# EAGLE board pp_module_rev_c_3_up (EAGLE 6.4), part 1 of 3
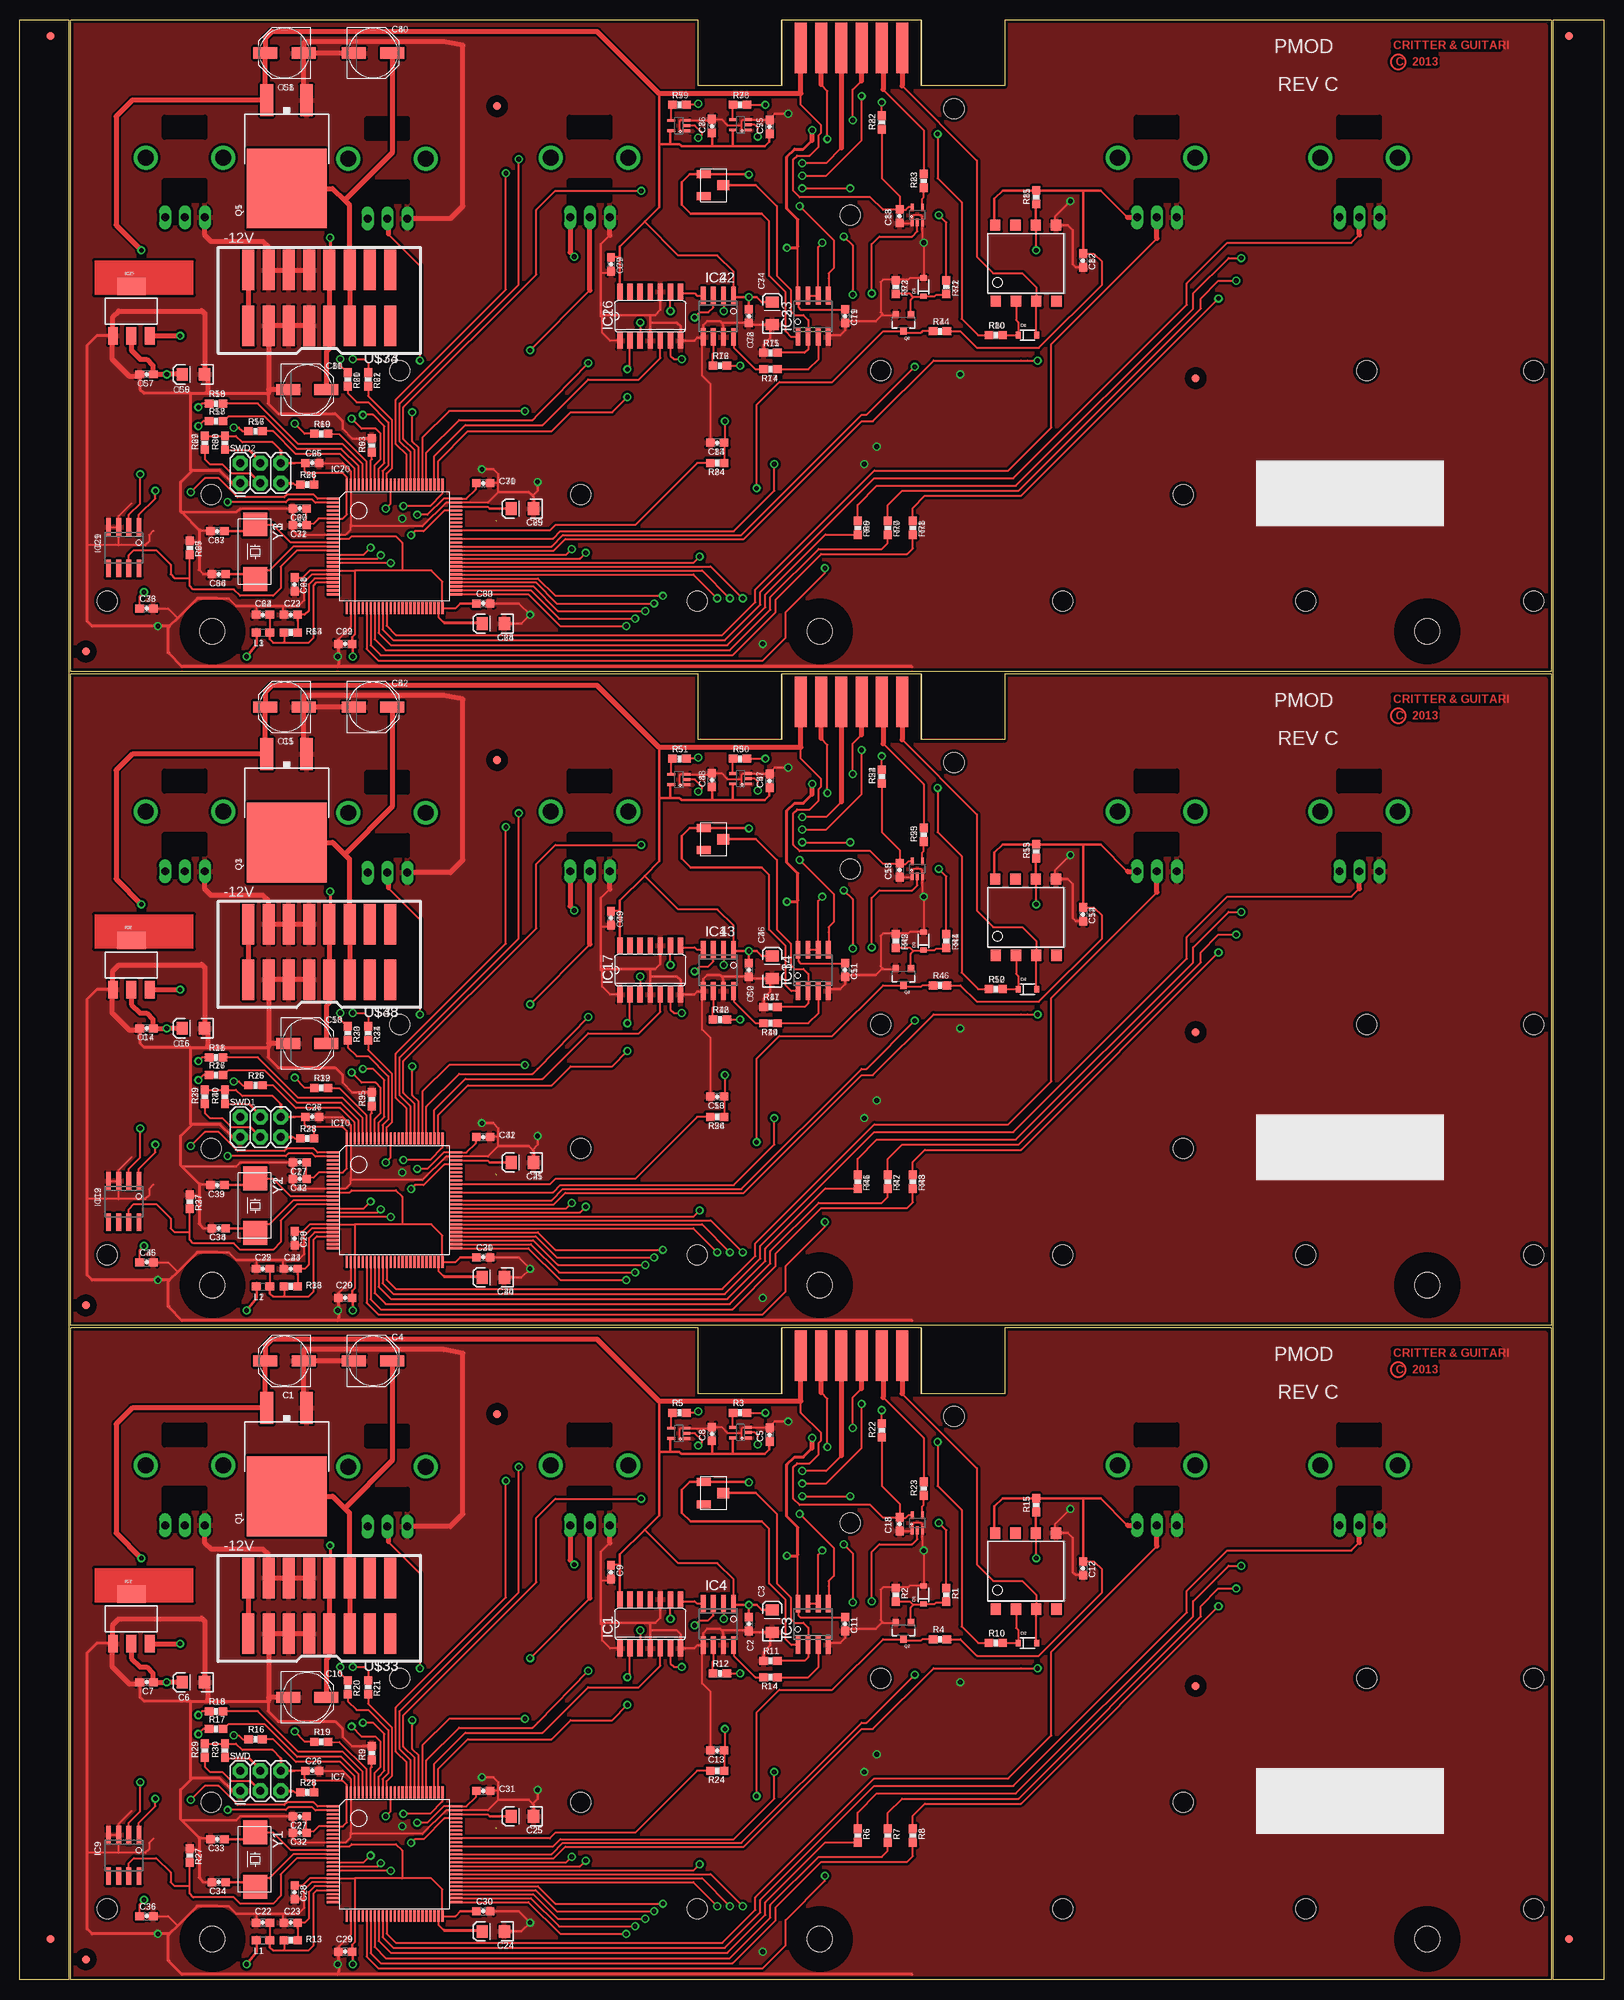
[diagram p0: board, top side]
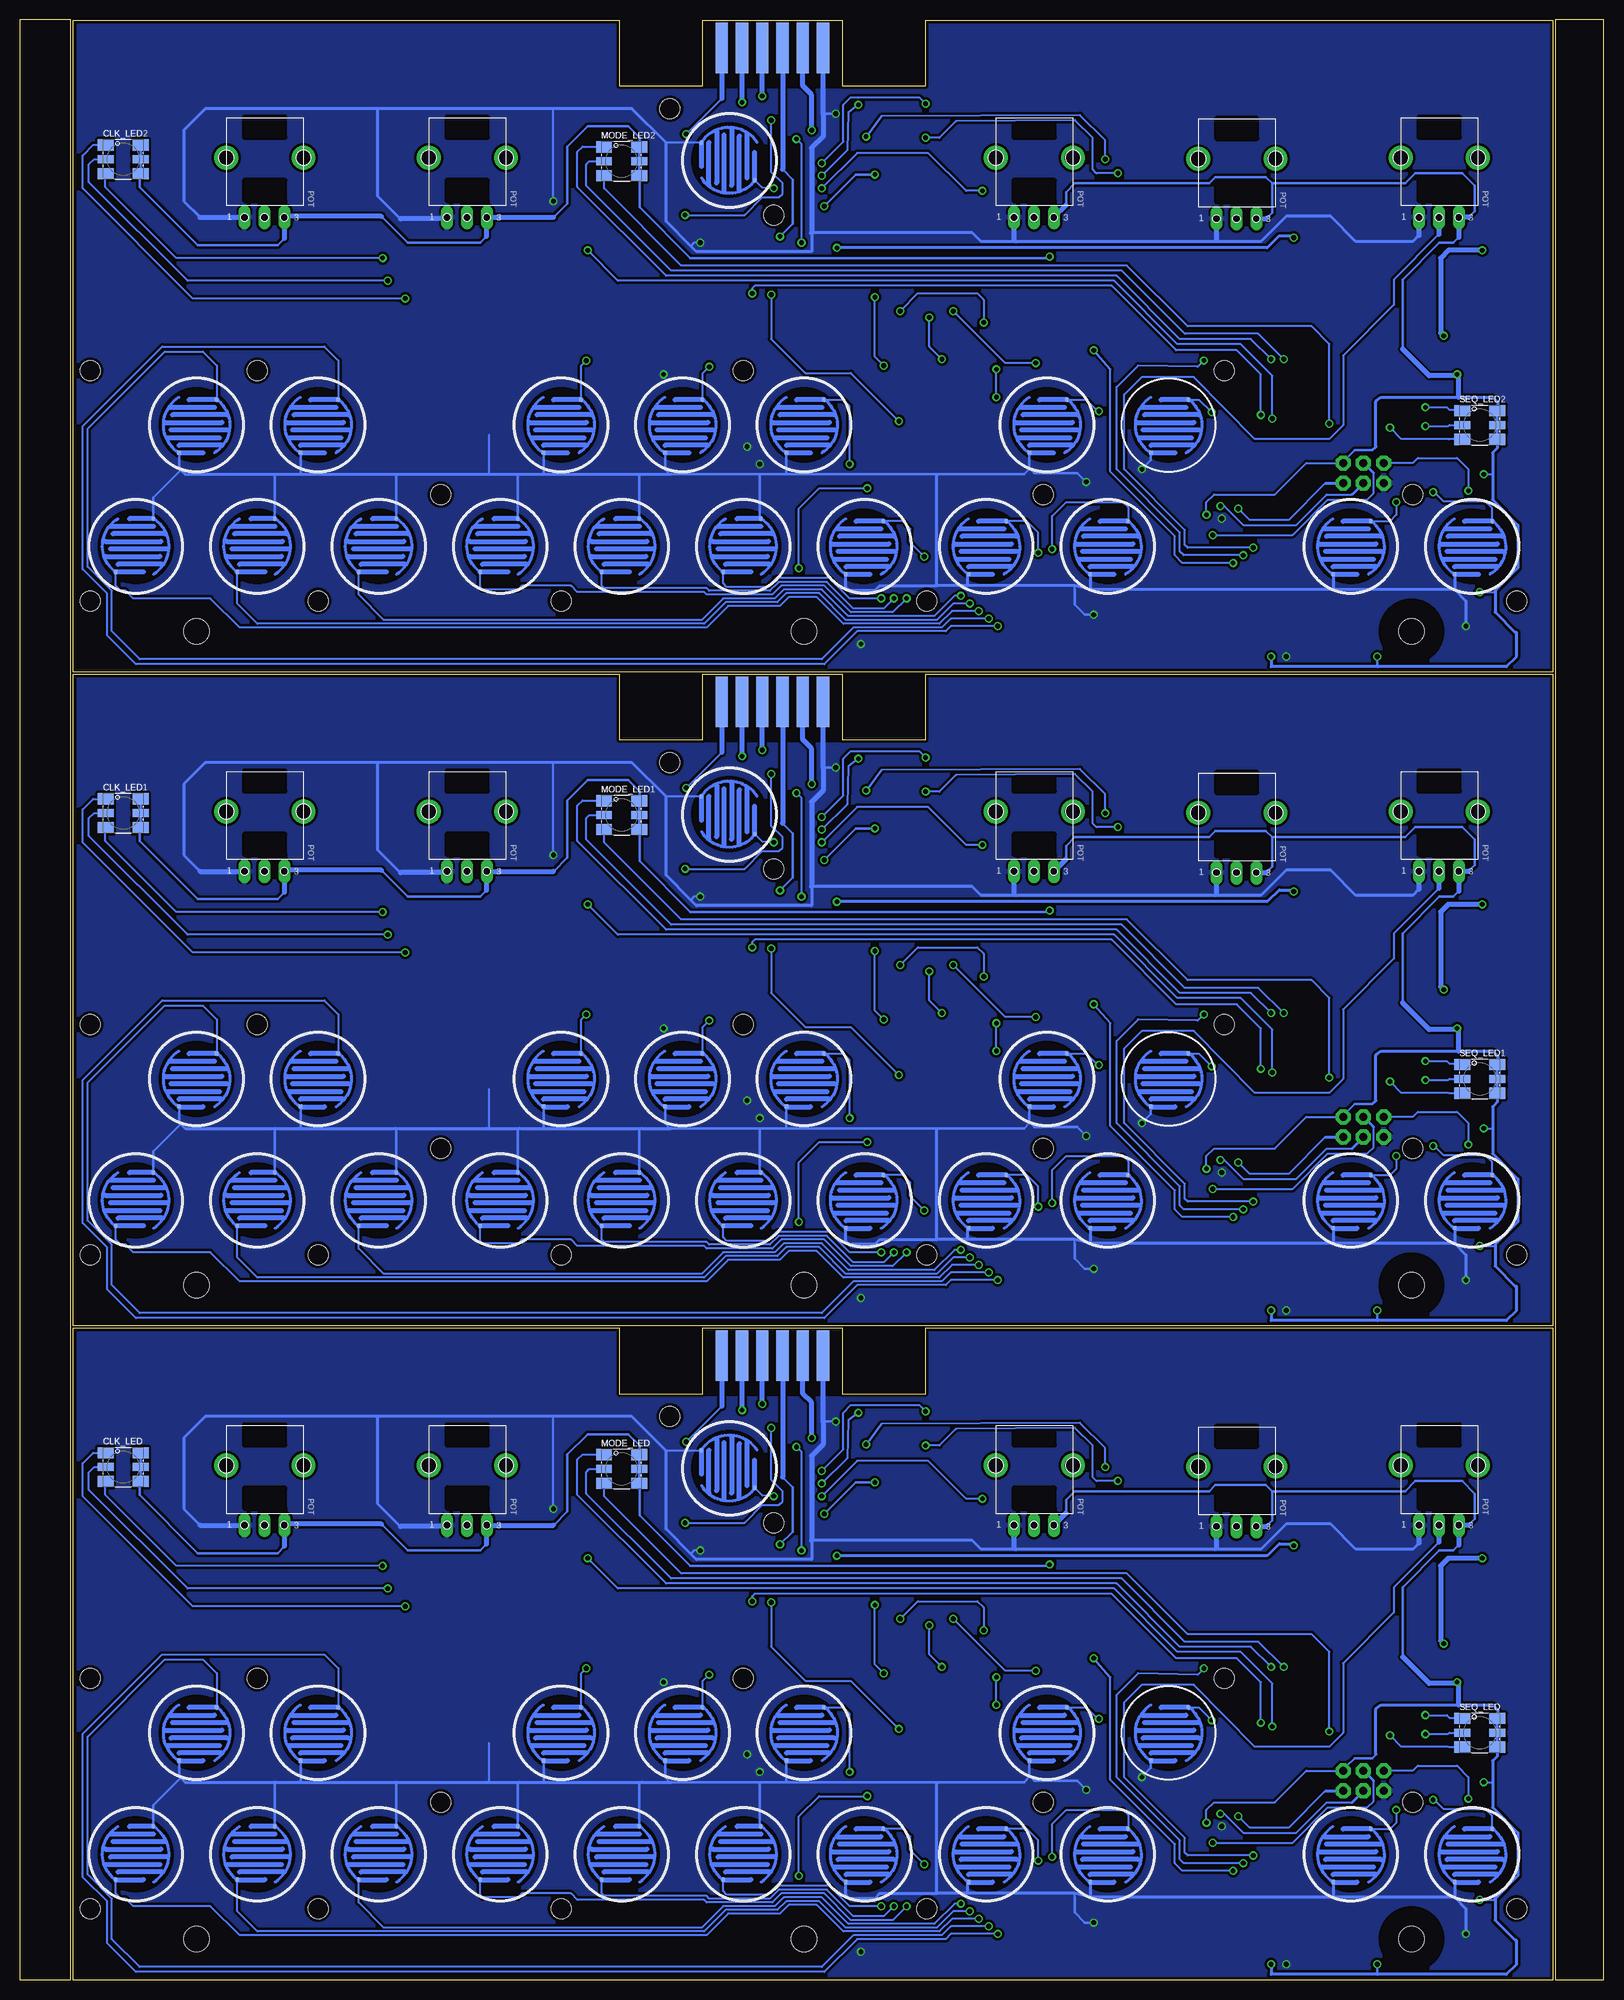
[diagram p1: board, bottom side, seen from below]

Size 198.69 x 245.87 mm. Coordinates in mm from the lower left corner, seen from the top.
Outline: 192.09,81.76 192.09,0.01 6.36,0.01 6.36,81.76 85.1,81.76 85.1,73.51 95.57,73.51 95.57,81.76 113.04,81.76 113.04,73.51 123.51,73.51 123.51,81.76 192.09,81.76
Outline: 192.09,163.81 192.09,82.05 6.36,82.05 6.36,163.81 85.1,163.81 85.1,155.55 95.57,155.55 95.57,163.81 113.04,163.81 113.04,155.55 123.51,155.55 123.51,163.81 192.09,163.81
Outline: 192.09,245.85 192.09,164.09 6.36,164.09 6.36,245.85 85.1,245.85 85.1,237.59 95.57,237.59 95.57,245.85 113.04,245.85 113.04,237.59 123.51,237.59 123.51,245.85 192.09,245.85
Outline: 0,0 0,245.87 6.1,245.87 6.1,0 0,0
Outline: 192.34,0 192.34,245.87 198.69,245.87 198.69,0 192.34,0
Copper layers (1*16): Top 0.035mm / dielectric 1.5mm / Bottom 0.035mm
Design rules "default": minimum track width 10mil, minimum drill 20mil, track to track 8mil, track to pad 8mil, pad to pad 8mil, via to via 8mil, smd to smd 8mil, copper to edge 15mil, drill to drill 8mil, minimum pad ring 10mil, minimum via ring 8mil, stop-mask expansion 4mil, vias tented up to drill 0mil, thermal gap 10mil
Net classes: 0 default: width 0.254 mm; 1 power: width 0.254 mm
Holes 3.2 mm at 176.53,5.09 24.13,5.09 100.33,5.09 176.53,87.13 24.13,87.13 100.33,87.13 176.53,169.18 24.13,169.18 100.33,169.18
Holes 2.54 mm at 145.9,22.23 70.33,22.23 23.98,22.23 168.92,37.79 107.96,37.79 161.3,8.9 130.82,8.9 84.94,8.9 10.96,8.9 189.87,8.9 189.87,37.79 47.63,37.79 117.16,70.65 104.15,57.32 145.9,104.27 70.33,104.27 23.98,104.27 168.92,119.83 107.96,119.83 161.3,90.94 130.82,90.94 84.94,90.94 10.96,90.94 189.87,90.94 189.87,119.83 47.63,119.83 117.16,152.69 104.15,139.36 145.9,186.32 70.33,186.32 23.98,186.32 168.92,201.87 107.96,201.87 161.3,172.98 130.82,172.98 84.94,172.98 10.96,172.98 189.87,172.98 189.87,201.87 47.63,201.87 117.16,234.73 104.15,221.4
tRestrict: area 20.3,1.3 to 27.9,8.9; area 96.5,1.3 to 104.1,8.9; area 172.7,1.3 to 180.3,8.9; area 20.3,83.3 to 27.9,90.9; area 96.5,83.3 to 104.1,90.9; area 172.7,83.3 to 180.3,90.9; area 20.3,165.4 to 27.9,173; area 96.5,165.4 to 104.1,173; area 172.7,165.4 to 180.3,173
bRestrict: area 20.3,1.3 to 27.9,8.9; area 96.5,1.3 to 104.1,8.9; area 172.7,1.3 to 180.3,8.9; area 20.3,83.3 to 27.9,90.9; area 96.5,83.3 to 104.1,90.9; area 172.7,83.3 to 180.3,90.9; area 20.3,165.4 to 27.9,173; area 96.5,165.4 to 104.1,173; area 172.7,165.4 to 180.3,173

## Footprints (pad centres in the part's own frame; a part is rotated, then mirrored left to right if it is on the bottom)
PANASONIC_D = smd 3 x 1.4: + 2.4,0; - -2.4,0
0603-CAP = smd 1.1 x 1: 1 -0.85,0; 2 0.85,0
EIA3216 = smd 1.4 x 1.6: A 1.4,0; C -1.4,0
LED-TRICOLOR-5050 = smd 2 x 1.4: 1 2.2,1.8; 2 -2.2,1.8; 5 2.2,-1.8; 6 -2.2,-1.8 | smd 2 x 1: 3 2.2,0; 4 -2.2,0
SOD-323 = smd 0.63 x 0.83: 1 -1.15,0; 2 1.15,0
POT-P09X-VERT = drill 1 pad 1.27 long: 1 -2.54,-7.51; 3 2.46,-7.51; WIPER -0.04,-7.51 | drill 2 pad 2.54: P$4 4.86,-0.01; P$5 -4.84,-0.01
FIDUCIAL_1MM = smd 1 x 1: 1 0,0
SO14 = smd 0.66 x 2.032: 1 -3.81,-3.073; 2 -2.54,-3.073; 3 -1.27,-3.073; 4 0,-3.073; 5 1.27,-3.073; 6 2.54,-3.073; 7 3.81,-3.073; 8 3.81,3.073; 9 2.54,3.073; 10 1.27,3.073; 11 0,3.073; 12 -1.27,3.073; 13 -2.54,3.073; 14 -3.81,3.073
SOT223 = smd 1.219 x 2.235: 1 -2.311,-3.099; 2 0,-3.099; 3 2.311,-3.099 | smd 3.6 x 2.2: 4 0,3.099
SO08 = smd 0.6 x 2.2: 1 -1.905,-2.6; 2 -0.635,-2.6; 3 0.635,-2.6; 4 1.905,-2.6; 5 1.905,2.6; 6 0.635,2.6; 7 -0.635,2.6; 8 -1.905,2.6
SC-70 = smd 0.36 x 0.95: 1 -0.65,-0.95; 2 0,-0.95; 3 0.65,-0.95; 4 0.65,0.95; 5 -0.65,0.95
LQFP100-14X14 = smd 0.27 x 1.5: 1 -6,-7.75; 2 -5.5,-7.75; 3 -5,-7.75; 4 -4.5,-7.75; 5 -4,-7.75; 6 -3.5,-7.75; 7 -3,-7.75; 8 -2.5,-7.75; 9 -2,-7.75; 10 -1.5,-7.75; 11 -1,-7.75; 12 -0.5,-7.75; 13 0,-7.75; 14 0.5,-7.75; 15 1,-7.75; 16 1.5,-7.75; 17 2,-7.75; 18 2.5,-7.75; 19 3,-7.75; 20 3.5,-7.75; 21 4,-7.75; 22 4.5,-7.75; 23 5,-7.75; 24 5.5,-7.75; 25 6,-7.75; 51 6,7.75; 52 5.5,7.75; 53 5,7.75; 54 4.5,7.75; 55 4,7.75; 56 3.5,7.75; 57 3,7.75; 58 2.5,7.75; 59 2,7.75; 60 1.5,7.75; 61 1,7.75; 62 0.5,7.75; 63 0,7.75; 64 -0.5,7.75; 65 -1,7.75; 66 -1.5,7.75; 67 -2,7.75; 68 -2.5,7.75; 69 -3,7.75; 70 -3.5,7.75; 71 -4,7.75; 72 -4.5,7.75; 73 -5,7.75; 74 -5.5,7.75; 75 -6,7.75 | smd 1.5 x 0.27: 26 7.75,-6; 27 7.75,-5.5; 28 7.75,-5; 29 7.75,-4.5; 30 7.75,-4; 31 7.75,-3.5; 32 7.75,-3; 33 7.75,-2.5; 34 7.75,-2; 35 7.75,-1.5; 36 7.75,-1; 37 7.75,-0.5; 38 7.75,0; 39 7.75,0.5; 40 7.75,1; 41 7.75,1.5; 42 7.75,2; 43 7.75,2.5; 44 7.75,3; 45 7.75,3.5; 46 7.75,4; 47 7.75,4.5; 48 7.75,5; 49 7.75,5.5; 50 7.75,6; 76 -7.75,6; 77 -7.75,5.5; 78 -7.75,5; 79 -7.75,4.5; 80 -7.75,4; 81 -7.75,3.5; 82 -7.75,3; 83 -7.75,2.5; 84 -7.75,2; 85 -7.75,1.5; 86 -7.75,1; 87 -7.75,0.5; 88 -7.75,0; 89 -7.75,-0.5; 90 -7.75,-1; 91 -7.75,-1.5; 92 -7.75,-2; 93 -7.75,-2.5; 94 -7.75,-3; 95 -7.75,-3.5; 96 -7.75,-4; 97 -7.75,-4.5; 98 -7.75,-5; 99 -7.75,-5.5; 100 -7.75,-6
0603 = smd 1.1 x 1: 1 -0.85,0; 2 0.85,0
KEY_CONTACT_RUBBER = smd 0.508 x 0.508: 1 -3.482,2.2; 2 3.183,-2.5
DPAK2 = smd 1.6 x 4: 1 -2.5,-10; 3 2.5,-10 | smd 10 x 10: 4 0,1.088
SOT23-3 = smd 0.8 x 0.9: 1 -0.95,-1; 2 0.95,-1; 3 0,1.1
0603-RES = smd 1.1 x 1: 1 -0.85,0; 2 0.85,0
2X3 = drill 1.016 pad 1.88 octagon: 1 0,0; 2 0,2.54; 3 2.54,0; 4 2.54,2.54; 5 5.08,0; 6 5.08,2.54
POT-TRIM-TT-43 = smd 1 x 1.8: 1 -1.4,-1.2; 3 1.4,-1.2 | smd 1.3 x 1.5: 2 0,1.22
CARDEDGE_12POS_MALE = smd 1.524 x 6.35: 1 6.35,0.635; 3 3.81,0.635; 5 1.27,0.635; 7 -1.27,0.635; 9 -3.81,0.635; 11 -6.35,0.635 | smd 1.524 x 6.35 bottom: 2 6.35,0.635; 4 3.81,0.635; 6 1.27,0.635; 8 -1.27,0.635; 10 -3.81,0.635; 12 -6.35,0.635
8-SMD = smd 1.3 x 1.4: 1 -3.96,-4.96; 2 -1.42,-4.96; 3 1.12,-4.96; 4 3.66,-4.96; 5 3.59,4.58; 6 1.05,4.58; 7 -1.49,4.58; 8 -4.03,4.58
2X8SMD = smd 1.524 x 5.08: P$1 -8.89,3.493; P$2 -6.35,3.493; P$3 -3.81,3.493; P$4 -1.27,3.493; P$5 1.27,3.493; P$6 3.81,3.493; P$7 6.35,3.493; P$8 8.89,3.493; P$9 -8.89,-3.493; P$10 -6.35,-3.493; P$11 -3.81,-3.493; P$12 -1.27,-3.493; P$13 1.27,-3.493; P$14 3.81,-3.493; P$15 6.35,-3.493; P$16 8.89,-3.493
CRYSTAL-SMD = smd 3 x 3: 1 -3.462,0; 2 3.39,0

## Placement (x,y rotation side)
C1  100u  [PANASONIC_D]  33.19,77.64 180 top
C2  100n  [0603-CAP]  91.45,44.62 270 top
C3  10u  [EIA3216]  94.36,44.97 90 top
C4  100u  [PANASONIC_D]  44.3,77.64 0 top
C5  100n  [0603-CAP]  94.04,68.36 90 top
C6  10u  [EIA3216]  21.76,37.31 180 top
C7  100n  [0603-CAP]  15.88,37.31 180 top
C8  100n  [0603-CAP]  86.8,68.47 90 top
C9  100n  [0603-CAP]  74.14,51.12 270 top
C10  100u  [PANASONIC_D]  36.04,35.41 0 top
C11  100n  [0603-CAP]  103.51,44.62 270 top
C12  100n  [0603-CAP]  133.36,51.6 270 top
C13  100n  [0603-CAP]  87.48,28.74 180 top
C14  100n  [0603-CAP]  15.88,119.35 180 top
C15  100u  [PANASONIC_D]  33.19,159.68 180 top
C16  10u  [EIA3216]  21.76,119.35 180 top
C17  100n  [0603-CAP]  35.09,102.53 180 top
C18  100n  [0603-CAP]  110.34,57.16 270 top
C19  100n  [0603-CAP]  34.46,93 270 top
C20  100n  [0603-CAP]  40.81,85.54 180 top
C21  100n  [0603-CAP]  58.11,90.62 0 top
C22  100n  [0603-CAP]  30.49,7.15 180 top
C23  100n  [0603-CAP]  33.98,7.15 180 top
C24  10u  [EIA3216]  59.38,6.04 180 top
C25  10u  [EIA3216]  63.03,20.49 180 top
C26  100n  [0603-CAP]  36.68,26.2 0 top
C27  100n  [0603-CAP]  35.09,20.49 180 top
C28  100n  [0603-CAP]  34.46,10.96 270 top
C29  100n  [0603-CAP]  40.81,3.5 180 top
C30  100n  [0603-CAP]  58.11,8.58 0 top
C31  100n  [0603-CAP]  58.11,23.66 0 top
C32  100n  [0603-CAP]  35.09,18.42 180 top
C33  22p  [0603-CAP]  24.77,17.63 180 top
C34  22p  [0603-CAP]  24.93,12.23 180 top
C35  100n  [0603-CAP]  30.49,89.19 180 top
C36  100n  [0603-CAP]  15.88,7.94 0 top
C37  100n  [0603-CAP]  36.68,108.24 0 top
C38  22p  [0603-CAP]  24.93,94.27 180 top
C39  22p  [0603-CAP]  24.77,99.67 180 top
C40  10u  [EIA3216]  59.38,88.08 180 top
C41  10u  [EIA3216]  63.03,102.53 180 top
C42  100n  [0603-CAP]  58.11,105.7 0 top
C43  100n  [0603-CAP]  35.09,100.46 180 top
C44  100n  [0603-CAP]  33.98,89.19 180 top
C45  100n  [0603-CAP]  15.88,89.99 0 top
C46  10u  [EIA3216]  94.36,127.01 90 top
C47  100n  [0603-CAP]  94.04,150.41 90 top
C48  100n  [0603-CAP]  86.8,150.51 90 top
C49  100n  [0603-CAP]  74.14,133.17 270 top
C50  100n  [0603-CAP]  91.45,126.66 270 top
C51  100n  [0603-CAP]  103.51,126.66 270 top
C52  100u  [PANASONIC_D]  44.3,159.68 0 top
C53  100u  [PANASONIC_D]  36.04,117.45 0 top
C54  100n  [0603-CAP]  133.36,133.64 270 top
C55  100n  [0603-CAP]  110.34,139.2 270 top
C56  100n  [0603-CAP]  87.48,110.78 180 top
C57  100n  [0603-CAP]  15.88,201.4 180 top
C58  100u  [PANASONIC_D]  33.19,241.72 180 top
C59  10u  [EIA3216]  21.76,201.4 180 top
C60  100n  [0603-CAP]  35.09,184.57 180 top
C61  100n  [0603-CAP]  34.46,175.04 270 top
C62  100n  [0603-CAP]  40.81,167.58 180 top
C63  100n  [0603-CAP]  58.11,172.66 0 top
C64  100n  [0603-CAP]  30.49,171.23 180 top
C65  100n  [0603-CAP]  36.68,190.28 0 top
C66  22p  [0603-CAP]  24.93,176.31 180 top
C67  22p  [0603-CAP]  24.77,181.71 180 top
C68  10u  [EIA3216]  59.38,170.12 180 top
C69  10u  [EIA3216]  63.03,184.57 180 top
C70  100n  [0603-CAP]  58.11,187.74 0 top
C71  100n  [0603-CAP]  35.09,182.51 180 top
C72  100n  [0603-CAP]  33.98,171.23 180 top
C73  100n  [0603-CAP]  15.88,172.03 0 top
C74  10u  [EIA3216]  94.36,209.05 90 top
C75  100n  [0603-CAP]  94.04,232.45 90 top
C76  100n  [0603-CAP]  86.8,232.55 90 top
C77  100n  [0603-CAP]  74.14,215.21 270 top
C78  100n  [0603-CAP]  91.45,208.7 270 top
C79  100n  [0603-CAP]  103.51,208.7 270 top
C80  100u  [PANASONIC_D]  44.3,241.72 0 top
C81  100u  [PANASONIC_D]  36.04,199.49 0 top
C82  100n  [0603-CAP]  133.36,215.68 270 top
C83  100n  [0603-CAP]  110.34,221.24 270 top
C84  100n  [0603-CAP]  87.48,192.82 180 top
CLK_LED  [LED-TRICOLOR-5050]  185.74,64.3 0 bottom
CLK_LED1  [LED-TRICOLOR-5050]  185.74,146.34 0 bottom
CLK_LED2  [LED-TRICOLOR-5050]  185.74,228.38 0 bottom
D1  [SOD-323]  113.35,48.27 90 top
D2  [SOD-323]  126.37,42.23 0 top
D3  [SOD-323]  113.35,130.31 90 top
D4  [SOD-323]  126.37,124.28 0 top
D5  [SOD-323]  113.35,212.35 90 top
D6  [SOD-323]  126.37,206.32 0 top
DUR  POTVERT  [POT-P09X-VERT]  20.66,64.52 0 bottom
DUR1  POTVERT  [POT-P09X-VERT]  20.66,146.56 0 bottom
DUR2  POTVERT  [POT-P09X-VERT]  20.66,228.61 0 bottom
E$1  [FIDUCIAL_1MM]  3.81,5.08 0 top
E$2  [FIDUCIAL_1MM]  3.81,243.84 0 top
E$3  [FIDUCIAL_1MM]  194.31,243.84 0 top
E$4  [FIDUCIAL_1MM]  194.31,5.08 0 top
GLIDE  POTVERT  [POT-P09X-VERT]  46.06,64.36 0 bottom
GLIDE1  POTVERT  [POT-P09X-VERT]  46.06,146.41 0 bottom
GLIDE2  POTVERT  [POT-P09X-VERT]  46.06,228.45 0 bottom
IC1  74125SO14  [SO14]  79.06,44.62 0 top
IC2  [SOT223]  13.98,45.25 0 top
IC3  [SO08]  99.49,44.59 0 top
IC4  MCP4821  [SO08]  87.6,44.59 180 top
IC5  741G125SC70  [SC-70]  82.65,68.53 90 top
IC6  741G125SC70  [SC-70]  112.56,57.32 0 top
IC7  STM32F407VGT6  [LQFP100-14X14]  47,15.72 270 top
IC8  [SOT223]  13.98,127.29 0 top
IC9  MAX708  [SO08]  13.02,15.56 180 top
IC10  STM32F407VGT6  [LQFP100-14X14]  47,97.76 270 top
IC11  741G125SC70  [SC-70]  90.37,68.63 90 top
IC12  MAX708  [SO08]  13.02,97.61 180 top
IC13  MCP4821  [SO08]  87.6,126.63 180 top
IC14  [SO08]  99.49,126.63 0 top
IC15  741G125SC70  [SC-70]  90.37,150.67 90 top
IC16  741G125SC70  [SC-70]  82.65,150.57 90 top
IC17  74125SO14  [SO14]  79.06,126.66 0 top
IC18  741G125SC70  [SC-70]  112.56,139.36 0 top
IC19  [SOT223]  13.98,209.33 0 top
IC20  STM32F407VGT6  [LQFP100-14X14]  47,179.81 270 top
IC21  MAX708  [SO08]  13.02,179.65 180 top
IC22  MCP4821  [SO08]  87.6,208.67 180 top
IC23  [SO08]  99.49,208.67 0 top
IC24  741G125SC70  [SC-70]  90.37,232.71 90 top
IC25  741G125SC70  [SC-70]  82.65,232.61 90 top
IC26  74125SO14  [SO14]  79.06,208.7 0 top
IC27  741G125SC70  [SC-70]  112.56,221.4 0 top
L1  10uH  [0603]  30.49,4.93 0 top
L2  10uH  [0603]  30.49,86.97 0 top
L3  10uH  [0603]  30.49,169.01 0 top
MODE  KEY_SWITCH_RUBBER  [KEY_CONTACT_RUBBER]  109.72,64.2 0 bottom
MODE1  KEY_SWITCH_RUBBER  [KEY_CONTACT_RUBBER]  109.72,146.25 0 bottom
MODE2  KEY_SWITCH_RUBBER  [KEY_CONTACT_RUBBER]  109.72,228.29 0 bottom
MODE_LED  [LED-TRICOLOR-5050]  123.23,64.06 0 bottom
MODE_LED1  [LED-TRICOLOR-5050]  123.23,146.1 0 bottom
MODE_LED2  [LED-TRICOLOR-5050]  123.23,228.14 0 bottom
Q1  MOSFET-PCHANNELDPAK2  [DPAK2]  33.46,61.72 180 top
Q2  [SOT23-3]  110.81,43.82 180 top
Q3  MOSFET-PCHANNELDPAK2  [DPAK2]  33.46,143.76 180 top
Q4  [SOT23-3]  110.81,125.86 180 top
Q5  MOSFET-PCHANNELDPAK2  [DPAK2]  33.46,225.8 180 top
Q6  [SOT23-3]  110.81,207.91 180 top
R1  1k  [0603-RES]  116.21,48.27 270 top
R2  1k  [0603-RES]  109.86,48.27 270 top
R3  1k  [0603-RES]  90.34,71.13 0 top
R4  1k  [0603-RES]  115.42,42.71 0 top
R5  1k  [0603-RES]  82.72,71.13 0 top
R6  1k  [0603-RES]  105.07,18.07 270 top
R7  1k  [0603-RES]  108.85,18.07 270 top
R8  1k  [0603-RES]  112,18.07 270 top
R9  1k  [0603-RES]  44.14,28.42 90 top
R10  220  [0603-RES]  122.4,42.23 0 top
R11  4.7k  [0603-RES]  94.15,40.01 0 top
R12  10k  [0603-RES]  87.8,38.42 0 top
R13  4.7k  [0603-RES]  33.98,4.93 180 top
R14  10k  [0603-RES]  94.15,37.95 180 top
R15  220  [0603-RES]  127.48,59.54 90 top
R16  1k  [0603-RES]  29.53,30.17 0 top
R17  1k  [0603-RES]  24.61,31.44 0 top
R18  1k  [0603-RES]  24.61,33.66 0 top
R19  1k  [0603-RES]  37.79,29.85 0 top
R20  1k  [0603-RES]  41.12,36.68 270 top
R21  1k  [0603-RES]  43.66,36.68 270 top
R22  220  [0603-RES]  108.12,68.9 90 top
R23  220  [0603-RES]  113.35,61.6 90 top
R24  10k  [0603-RES]  87.48,26.2 180 top
R25  1k  [0603-RES]  29.53,112.21 0 top
R26  1k  [0603-RES]  24.61,113.48 0 top
R27  10k  [0603-RES]  21.28,15.56 270 top
R28  10k  [0603-RES]  36.04,23.5 0 top
R29  10k  [0603-RES]  23.18,28.74 90 top
R30  10k  [0603-RES]  25.72,28.74 90 top
R31  1k  [0603-RES]  24.61,115.7 0 top
R32  1k  [0603-RES]  37.79,111.89 0 top
R33  1k  [0603-RES]  41.12,118.72 270 top
R34  1k  [0603-RES]  43.66,118.72 270 top
R35  1k  [0603-RES]  44.14,110.46 90 top
R36  4.7k  [0603-RES]  33.98,86.97 180 top
R37  10k  [0603-RES]  21.28,97.61 270 top
R38  10k  [0603-RES]  36.04,105.54 0 top
R39  10k  [0603-RES]  23.18,110.78 90 top
R40  10k  [0603-RES]  25.72,110.78 90 top
R41  1k  [0603-RES]  105.07,100.11 270 top
R42  1k  [0603-RES]  108.85,100.11 270 top
R43  1k  [0603-RES]  112,100.11 270 top
R44  1k  [0603-RES]  116.21,130.31 270 top
R45  1k  [0603-RES]  109.86,130.31 270 top
R46  1k  [0603-RES]  115.42,124.75 0 top
R47  4.7k  [0603-RES]  94.15,122.05 0 top
R48  10k  [0603-RES]  87.8,120.47 0 top
R49  10k  [0603-RES]  94.15,119.99 180 top
R50  1k  [0603-RES]  90.34,153.17 0 top
R51  1k  [0603-RES]  82.72,153.17 0 top
R52  220  [0603-RES]  122.4,124.28 0 top
R53  220  [0603-RES]  127.48,141.58 90 top
R54  220  [0603-RES]  108.12,150.95 90 top
R55  220  [0603-RES]  113.35,143.64 90 top
R56  10k  [0603-RES]  87.48,108.24 180 top
R57  1k  [0603-RES]  29.53,194.25 0 top
R58  1k  [0603-RES]  24.61,195.52 0 top
R59  1k  [0603-RES]  24.61,197.75 0 top
R60  1k  [0603-RES]  37.79,193.94 0 top
R61  1k  [0603-RES]  41.12,200.76 270 top
R62  1k  [0603-RES]  43.66,200.76 270 top
R63  1k  [0603-RES]  44.14,192.51 90 top
R64  4.7k  [0603-RES]  33.98,169.01 180 top
R65  10k  [0603-RES]  21.28,179.65 270 top
R66  10k  [0603-RES]  36.04,187.59 0 top
R67  10k  [0603-RES]  23.18,192.82 90 top
R68  10k  [0603-RES]  25.72,192.82 90 top
R69  1k  [0603-RES]  105.07,182.16 270 top
R70  1k  [0603-RES]  108.85,182.16 270 top
R71  1k  [0603-RES]  112,182.16 270 top
R72  1k  [0603-RES]  116.21,212.35 270 top
R73  1k  [0603-RES]  109.86,212.35 270 top
R74  1k  [0603-RES]  115.42,206.79 0 top
R75  4.7k  [0603-RES]  94.15,204.1 0 top
R76  10k  [0603-RES]  87.8,202.51 0 top
R77  10k  [0603-RES]  94.15,202.03 180 top
R78  1k  [0603-RES]  90.34,235.21 0 top
R79  1k  [0603-RES]  82.72,235.21 0 top
R80  220  [0603-RES]  122.4,206.32 0 top
R81  220  [0603-RES]  127.48,223.62 90 top
R82  220  [0603-RES]  108.12,232.99 90 top
R83  220  [0603-RES]  113.35,225.69 90 top
R84  10k  [0603-RES]  87.48,190.28 180 top
RANGE  POTVERT  [POT-P09X-VERT]  142.58,64.52 0 bottom
RANGE1  POTVERT  [POT-P09X-VERT]  142.58,146.56 0 bottom
RANGE2  POTVERT  [POT-P09X-VERT]  142.58,228.61 0 bottom
RATE  POTVERT  [POT-P09X-VERT]  167.98,64.52 0 bottom
RATE1  POTVERT  [POT-P09X-VERT]  167.98,146.56 0 bottom
RATE2  POTVERT  [POT-P09X-VERT]  167.98,228.61 0 bottom
SEQ_LED  [LED-TRICOLOR-5050]  15.56,30.96 0 bottom
SEQ_LED1  [LED-TRICOLOR-5050]  15.56,113 0 bottom
SEQ_LED2  [LED-TRICOLOR-5050]  15.56,195.05 0 bottom
SWD  SWD6PIN  [2X3]  27.63,23.66 0 top
SWD1  SWD6PIN  [2X3]  27.63,105.7 0 top
SWD2  SWD6PIN  [2X3]  27.63,187.74 0 top
TUNE  POTVERT  [POT-P09X-VERT]  71.46,64.52 0 bottom
TUNE1  POTVERT  [POT-P09X-VERT]  71.46,146.56 0 bottom
TUNE2  POTVERT  [POT-P09X-VERT]  71.46,228.61 0 bottom
U$1  FIDUCIAL  [FIDUCIAL_1MM]  147.49,36.84 0 top
U$2  POTSMD-TRIMMER  [POT-TRIM-TT-43]  86.98,61.05 270 top
U$3  CARDEDGE_12POS_MALE  [CARDEDGE_12POS_MALE]  104.31,77.64 0 top
U$4  OPTO_DARL_6N138S  [8-SMD]  126.37,51.44 0 top
U$5  KEY_SWITCH_RUBBER  [KEY_CONTACT_RUBBER]  161.3,30.96 90 bottom
U$6  KEY_SWITCH_RUBBER  [KEY_CONTACT_RUBBER]  123.2,15.72 270 bottom
U$7  KEY_SWITCH_RUBBER  [KEY_CONTACT_RUBBER]  176.54,30.96 90 bottom
U$8  KEY_SWITCH_RUBBER  [KEY_CONTACT_RUBBER]  107.96,15.72 270 bottom
U$9  KEY_SWITCH_RUBBER  [KEY_CONTACT_RUBBER]  184.16,15.72 270 bottom
U$10  KEY_SWITCH_RUBBER  [KEY_CONTACT_RUBBER]  92.88,15.72 90 bottom
U$11  KEY_SWITCH_RUBBER  [KEY_CONTACT_RUBBER]  168.92,15.72 270 bottom
U$12  KEY_SWITCH_RUBBER  [KEY_CONTACT_RUBBER]  77.48,15.72 90 bottom
U$13  KEY_SWITCH_RUBBER  [KEY_CONTACT_RUBBER]  153.68,15.72 270 bottom
U$14  KEY_SWITCH_RUBBER  [KEY_CONTACT_RUBBER]  62.24,15.72 90 bottom
U$15  KEY_SWITCH_RUBBER  [KEY_CONTACT_RUBBER]  115.58,30.96 90 bottom
U$16  KEY_SWITCH_RUBBER  [KEY_CONTACT_RUBBER]  130.82,30.96 90 bottom
U$17  KEY_SWITCH_RUBBER  [KEY_CONTACT_RUBBER]  100.34,30.96 90 bottom
U$18  KEY_SWITCH_RUBBER  [KEY_CONTACT_RUBBER]  16.52,15.72 90 bottom
U$19  KEY_SWITCH_RUBBER  [KEY_CONTACT_RUBBER]  138.44,15.72 270 bottom
U$20  KEY_SWITCH_RUBBER  [KEY_CONTACT_RUBBER]  31.76,15.72 90 bottom
U$21  KEY_SWITCH_RUBBER  [KEY_CONTACT_RUBBER]  69.86,30.96 90 bottom
U$22  KEY_SWITCH_RUBBER  [KEY_CONTACT_RUBBER]  54.62,30.96 90 bottom
U$23  FIDUCIAL  [FIDUCIAL_1MM]  8.26,2.55 0 top
U$24  FIDUCIAL  [FIDUCIAL_1MM]  59.86,70.97 0 top
U$25  LOGOCG  [LOGO-CG]  184.32,78.11 0 top
U$26  KEY_SWITCH_RUBBER  [KEY_CONTACT_RUBBER]  161.3,113 90 bottom
U$27  KEY_SWITCH_RUBBER  [KEY_CONTACT_RUBBER]  176.54,113 90 bottom
U$28  KEY_SWITCH_RUBBER  [KEY_CONTACT_RUBBER]  184.16,97.76 270 bottom
U$29  KEY_SWITCH_RUBBER  [KEY_CONTACT_RUBBER]  168.92,97.76 270 bottom
U$30  KEY_SWITCH_RUBBER  [KEY_CONTACT_RUBBER]  153.68,97.76 270 bottom
U$31  KEY_SWITCH_RUBBER  [KEY_CONTACT_RUBBER]  115.58,113 90 bottom
U$32  KEY_SWITCH_RUBBER  [KEY_CONTACT_RUBBER]  100.34,113 90 bottom
U$33  DOEPFER_16_CONNSMD  [2X8SMD]  37.54,46.9 180 top
U$34  KEY_SWITCH_RUBBER  [KEY_CONTACT_RUBBER]  138.44,97.76 270 bottom
U$35  KEY_SWITCH_RUBBER  [KEY_CONTACT_RUBBER]  123.2,97.76 270 bottom
U$36  KEY_SWITCH_RUBBER  [KEY_CONTACT_RUBBER]  107.96,97.76 270 bottom
U$37  KEY_SWITCH_RUBBER  [KEY_CONTACT_RUBBER]  92.88,97.76 90 bottom
U$38  KEY_SWITCH_RUBBER  [KEY_CONTACT_RUBBER]  77.48,97.76 90 bottom
U$39  KEY_SWITCH_RUBBER  [KEY_CONTACT_RUBBER]  62.24,97.76 90 bottom
U$40  KEY_SWITCH_RUBBER  [KEY_CONTACT_RUBBER]  130.82,113 90 bottom
U$41  KEY_SWITCH_RUBBER  [KEY_CONTACT_RUBBER]  16.52,97.76 90 bottom
U$42  KEY_SWITCH_RUBBER  [KEY_CONTACT_RUBBER]  31.76,97.76 90 bottom
U$43  KEY_SWITCH_RUBBER  [KEY_CONTACT_RUBBER]  69.86,113 90 bottom
U$44  KEY_SWITCH_RUBBER  [KEY_CONTACT_RUBBER]  54.62,113 90 bottom
U$45  FIDUCIAL  [FIDUCIAL_1MM]  8.26,84.59 0 top
U$46  LOGOCG  [LOGO-CG]  184.32,160.15 0 top
U$47  FIDUCIAL  [FIDUCIAL_1MM]  147.49,118.88 0 top
U$48  DOEPFER_16_CONNSMD  [2X8SMD]  37.54,128.94 180 top
U$49  POTSMD-TRIMMER  [POT-TRIM-TT-43]  86.98,143.09 270 top
U$50  CARDEDGE_12POS_MALE  [CARDEDGE_12POS_MALE]  104.31,159.68 0 top
U$51  OPTO_DARL_6N138S  [8-SMD]  126.37,133.48 0 top
U$52  FIDUCIAL  [FIDUCIAL_1MM]  59.86,153.01 0 top
U$53  KEY_SWITCH_RUBBER  [KEY_CONTACT_RUBBER]  161.3,195.05 90 bottom
U$54  KEY_SWITCH_RUBBER  [KEY_CONTACT_RUBBER]  176.54,195.05 90 bottom
U$55  KEY_SWITCH_RUBBER  [KEY_CONTACT_RUBBER]  184.16,179.81 270 bottom
U$56  KEY_SWITCH_RUBBER  [KEY_CONTACT_RUBBER]  168.92,179.81 270 bottom
U$57  KEY_SWITCH_RUBBER  [KEY_CONTACT_RUBBER]  153.68,179.81 270 bottom
U$58  KEY_SWITCH_RUBBER  [KEY_CONTACT_RUBBER]  115.58,195.05 90 bottom
U$59  KEY_SWITCH_RUBBER  [KEY_CONTACT_RUBBER]  100.34,195.05 90 bottom
U$60  KEY_SWITCH_RUBBER  [KEY_CONTACT_RUBBER]  138.44,179.81 270 bottom
U$61  KEY_SWITCH_RUBBER  [KEY_CONTACT_RUBBER]  123.2,179.81 270 bottom
U$62  KEY_SWITCH_RUBBER  [KEY_CONTACT_RUBBER]  107.96,179.81 270 bottom
U$63  KEY_SWITCH_RUBBER  [KEY_CONTACT_RUBBER]  92.88,179.81 90 bottom
U$64  KEY_SWITCH_RUBBER  [KEY_CONTACT_RUBBER]  77.48,179.81 90 bottom
U$65  KEY_SWITCH_RUBBER  [KEY_CONTACT_RUBBER]  62.24,179.81 90 bottom
U$66  KEY_SWITCH_RUBBER  [KEY_CONTACT_RUBBER]  130.82,195.05 90 bottom
U$67  KEY_SWITCH_RUBBER  [KEY_CONTACT_RUBBER]  16.52,179.81 90 bottom
U$68  KEY_SWITCH_RUBBER  [KEY_CONTACT_RUBBER]  31.76,179.81 90 bottom
U$69  KEY_SWITCH_RUBBER  [KEY_CONTACT_RUBBER]  69.86,195.05 90 bottom
U$70  KEY_SWITCH_RUBBER  [KEY_CONTACT_RUBBER]  54.62,195.05 90 bottom
U$71  FIDUCIAL  [FIDUCIAL_1MM]  8.26,166.63 0 top
U$72  LOGOCG  [LOGO-CG]  184.32,242.2 0 top
U$73  FIDUCIAL  [FIDUCIAL_1MM]  147.49,200.92 0 top
U$74  DOEPFER_16_CONNSMD  [2X8SMD]  37.54,210.99 180 top
U$75  POTSMD-TRIMMER  [POT-TRIM-TT-43]  86.98,225.13 270 top
U$76  CARDEDGE_12POS_MALE  [CARDEDGE_12POS_MALE]  104.31,241.72 0 top
U$77  OPTO_DARL_6N138S  [8-SMD]  126.37,215.53 0 top
U$78  FIDUCIAL  [FIDUCIAL_1MM]  59.86,235.05 0 top
Y1  [CRYSTAL-SMD]  29.51,15.03 270 top
Y2  [CRYSTAL-SMD]  29.51,97.08 270 top
Y3  [CRYSTAL-SMD]  29.51,179.12 270 top

## Library data of the parts
C1-C84 CLK_LED CLK_LED1 CLK_LED2 D1-D6 DUR DUR1 DUR2 E$1-E$4 GLIDE GLIDE1 GLIDE2 IC1-IC6 IC8 IC9 IC11-IC19 IC21-IC27 L1-L3 MODE MODE1 MODE2 MODE_LED MODE_LED1 MODE_LED2 Q1-Q6 R1-R84 RANGE RANGE1 RANGE2 RATE RATE1 RATE2 SEQ_LED SEQ_LED1 SEQ_LED2 SWD SWD1 SWD2 TUNE TUNE1 TUNE2 U$1-U$3 U$5-U$50 U$52-U$76 U$78 Y1-Y3 = osborn
IC7 IC10 IC20 = osborn; DIGIKEY: 497-11605-ND; MOUSER: 511-STM32F407VGT6
U$4 U$51 U$77 = SparkFun-20110623

## Nets
1V/OCT_J: IC3.6 IC3.7 U$3.9
1V/OCT_J1: IC14.6 IC14.7 U$50.9
1V/OCT_J2: IC23.6 IC23.7 U$76.9
+3.3V [power]: C6.A C7.1 C12.1 C26.1 C27.1 C28.1 C29.1 C30.1 C31.1 C32.1 C36.1 CLK_LED.1 CLK_LED.3 CLK_LED.5 DUR.3 GLIDE.3 IC2.2 IC7.6 IC7.11 IC7.19 IC7.28 IC7.50 IC7.75 IC7.100 IC9.2 L1.1 MODE_LED.1 MODE_LED.3 MODE_LED.5 R4.2 R15.2 R28.2 R29.2 R30.2 RANGE.3 RATE.3 SEQ_LED.1 SEQ_LED.3 SEQ_LED.5 SWD.6 TUNE.3 U$4.8
+3.3V1 [power]: C14.1 C16.A C17.1 C19.1 C20.1 C21.1 C37.1 C42.1 C43.1 C45.1 C54.1 CLK_LED1.1 CLK_LED1.3 CLK_LED1.5 DUR1.3 GLIDE1.3 IC8.2 IC10.6 IC10.11 IC10.19 IC10.28 IC10.50 IC10.75 IC10.100 IC12.2 L2.1 MODE_LED1.1 MODE_LED1.3 MODE_LED1.5 R38.2 R39.2 R40.2 R46.2 R53.2 RANGE1.3 RATE1.3 SEQ_LED1.1 SEQ_LED1.3 SEQ_LED1.5 SWD1.6 TUNE1.3 U$51.8
+3.3V2 [power]: C57.1 C59.A C60.1 C61.1 C62.1 C63.1 C65.1 C70.1 C71.1 C73.1 C82.1 CLK_LED2.1 CLK_LED2.3 CLK_LED2.5 DUR2.3 GLIDE2.3 IC19.2 IC20.6 IC20.11 IC20.19 IC20.28 IC20.50 IC20.75 IC20.100 IC21.2 L3.1 MODE_LED2.1 MODE_LED2.3 MODE_LED2.5 R66.2 R67.2 R68.2 R74.2 R81.2 RANGE2.3 RATE2.3 SEQ_LED2.1 SEQ_LED2.3 SEQ_LED2.5 SWD2.6 TUNE2.3 U$77.8
+5V [power]: C1.+ C2.1 C3.A C5.1 C8.1 C9.1 C18.1 IC1.14 IC2.3 IC4.1 IC5.5 IC6.5 IC11.5 Q1.3 R12.2 R22.1 U$3.11
+5V1 [power]: C15.+ C46.A C47.1 C48.1 C49.1 C50.1 C55.1 IC8.3 IC13.1 IC15.5 IC16.5 IC17.14 IC18.5 Q3.3 R48.2 R54.1 U$50.11
+5V2 [power]: C58.+ C74.A C75.1 C76.1 C77.1 C78.1 C83.1 IC19.3 IC22.1 IC24.5 IC25.5 IC26.14 IC27.5 Q5.3 R76.2 R82.1 U$76.11
+12V: C10.+ C11.1 IC3.8 U$3.10 U$33.P$4 U$33.P$12
+12V1: C51.1 C53.+ IC14.8 U$48.P$4 U$48.P$12 U$50.10
+12V2: C79.1 C81.+ IC23.8 U$74.P$4 U$74.P$12 U$76.10
-12V: U$33.P$8 U$33.P$16
-12V1: U$48.P$8 U$48.P$16
-12V2: U$74.P$8 U$74.P$16
CLK_LED_1: IC7.34 R6.2
CLK_LED_2: IC7.33 R7.2
CLK_LED_3: IC7.32 R8.2
CLK_LED_4: IC10.34 R41.2
CLK_LED_5: IC10.33 R42.2
CLK_LED_6: IC10.32 R43.2
CLK_LED_7: IC20.34 R69.2
CLK_LED_8: IC20.33 R70.2
CLK_LED_9: IC20.32 R71.2
CLKIN: IC7.31 Q2.3 R4.1
CLKIN1: IC10.31 Q4.3 R46.1
CLKIN2: IC20.31 Q6.3 R74.1
CLKIN_J: R1.1 U$3.5
CLKIN_J1: R44.1 U$50.5
CLKIN_J2: R72.1 U$76.5
DAC_CS: IC1.2 IC7.77
DAC_CS1: IC10.77 IC17.2
DAC_CS2: IC20.77 IC26.2
DAC_MOSI: IC1.9 IC7.80
DAC_MOSI1: IC10.80 IC17.9
DAC_MOSI2: IC20.80 IC26.9
DAC_OUT: IC4.8 R14.2
DAC_OUT1: IC13.8 R49.2
DAC_OUT2: IC22.8 R77.2
DAC_SCK: IC1.5 IC7.78
DAC_SCK1: IC10.78 IC17.5
DAC_SCK2: IC20.78 IC26.5
DUR: DUR.WIPER IC7.15
DUR1: DUR1.WIPER IC10.15
DUR2: DUR2.WIPER IC20.15
GATE: IC5.2 IC7.85
GATE1: IC10.85 IC16.2
GATE2: IC20.85 IC25.2
GATE_J: R5.2 U$3.7
GATE_J1: R51.2 U$50.7
GATE_J2: R79.2 U$76.7
GLIDE: GLIDE.WIPER IC7.16
GLIDE1: GLIDE1.WIPER IC10.16
GLIDE2: GLIDE2.WIPER IC20.16
GND: C1.- C2.2 C3.C C4.- C5.2 C6.C C7.2 C8.2 C9.2 C10.- C11.2 C12.2 C13.2 C18.2 C22.2 C23.2 C24.C C25.C C26.2 C27.2 C28.2 C29.2 C30.2 C31.2 C32.2 C33.2 C34.2 C36.2 D1.2 DUR.1 GLIDE.1 IC1.1 IC1.4 IC1.7 IC1.10 IC2.1 IC3.4 IC4.5 IC4.7 IC5.1 IC5.3 IC6.1 IC6.3 IC7.10 IC7.20 IC7.27 IC7.74 IC7.99 IC9.3 IC9.4 IC11.1 IC11.3 MODE.1 Q1.1 Q2.2 R2.1 R9.2 R11.1 R27.1 RANGE.1 RATE.1 SWD.1 TUNE.1 U$3.12 U$4.5 U$5.1 U$6.1 U$7.1 U$8.1 U$9.1 U$10.1 U$11.1 U$12.1 U$13.1 U$14.1 U$15.1 U$16.1 U$17.1 U$18.1 U$19.1 U$20.1 U$21.1 U$22.1 U$33.P$5 U$33.P$6 U$33.P$7 U$33.P$13 U$33.P$14 U$33.P$15
GND1: C14.2 C15.- C16.C C17.2 C19.2 C20.2 C21.2 C35.2 C37.2 C38.2 C39.2 C40.C C41.C C42.2 C43.2 C44.2 C45.2 C46.C C47.2 C48.2 C49.2 C50.2 C51.2 C52.- C53.- C54.2 C55.2 C56.2 D3.2 DUR1.1 GLIDE1.1 IC8.1 IC10.10 IC10.20 IC10.27 IC10.74 IC10.99 IC12.3 IC12.4 IC13.5 IC13.7 IC14.4 IC15.1 IC15.3 IC16.1 IC16.3 IC17.1 IC17.4 IC17.7 IC17.10 IC18.1 IC18.3 MODE1.1 Q3.1 Q4.2 R35.2 R37.1 R45.1 R47.1 RANGE1.1 RATE1.1 SWD1.1 TUNE1.1 U$26.1 U$27.1 U$28.1 U$29.1 U$30.1 U$31.1 U$32.1 U$34.1 U$35.1 U$36.1 U$37.1 U$38.1 U$39.1 U$40.1 U$41.1 U$42.1 U$43.1 U$44.1 U$48.P$5 U$48.P$6 U$48.P$7 U$48.P$13 U$48.P$14 U$48.P$15 U$50.12 U$51.5
GND2: C57.2 C58.- C59.C C60.2 C61.2 C62.2 C63.2 C64.2 C65.2 C66.2 C67.2 C68.C C69.C C70.2 C71.2 C72.2 C73.2 C74.C C75.2 C76.2 C77.2 C78.2 C79.2 C80.- C81.- C82.2 C83.2 C84.2 D5.2 DUR2.1 GLIDE2.1 IC19.1 IC20.10 IC20.20 IC20.27 IC20.74 IC20.99 IC21.3 IC21.4 IC22.5 IC22.7 IC23.4 IC24.1 IC24.3 IC25.1 IC25.3 IC26.1 IC26.4 IC26.7 IC26.10 IC27.1 IC27.3 MODE2.1 Q5.1 Q6.2 R63.2 R65.1 R73.1 R75.1 RANGE2.1 RATE2.1 SWD2.1 TUNE2.1 U$53.1 U$54.1 U$55.1 U$56.1 U$57.1 U$58.1 U$59.1 U$60.1 U$61.1 U$62.1 U$63.1 U$64.1 U$65.1 U$66.1 U$67.1 U$68.1 U$69.1 U$70.1 U$74.P$5 U$74.P$6 U$74.P$7 U$74.P$13 U$74.P$14 U$74.P$15 U$76.12 U$77.5
K1: IC7.51 U$5.2
K2: IC7.52 U$7.2
K3: IC7.53 U$9.2
K4: IC7.54 U$11.2
K5: IC7.55 U$13.2
K6: IC7.63 U$15.2
K7: IC7.65 U$17.2
K8: IC7.56 U$19.2
K9: IC7.57 U$6.2
K10: IC7.58 U$8.2
K11: IC7.59 U$10.2
K12: IC7.60 U$12.2
K13: IC7.61 U$14.2
K14: IC7.62 U$16.2
K15: IC7.1 U$18.2
K16: IC7.2 U$20.2
K17: IC7.81 U$21.2
K18: IC7.82 U$22.2
K19: IC10.51 U$26.2
K20: IC10.52 U$27.2
K21: IC10.53 U$28.2
K22: IC10.54 U$29.2
K23: IC10.55 U$30.2
K24: IC10.63 U$31.2
K25: IC10.65 U$32.2
K26: IC10.56 U$34.2
K27: IC10.2 U$42.2
K28: IC10.1 U$41.2
K29: IC10.62 U$40.2
K30: IC10.61 U$39.2
K31: IC10.60 U$38.2
K32: IC10.59 U$37.2
K33: IC10.58 U$36.2
K34: IC10.57 U$35.2
K35: IC10.81 U$43.2
K36: IC10.82 U$44.2
K37: IC20.51 U$53.2
K38: IC20.52 U$54.2
K39: IC20.53 U$55.2
K40: IC20.54 U$56.2
K41: IC20.55 U$57.2
K42: IC20.63 U$58.2
K43: IC20.65 U$59.2
K44: IC20.56 U$60.2
K45: IC20.2 U$68.2
K46: IC20.1 U$67.2
K47: IC20.62 U$66.2
K48: IC20.61 U$65.2
K49: IC20.60 U$64.2
K50: IC20.59 U$63.2
K51: IC20.58 U$62.2
K52: IC20.57 U$61.2
K53: IC20.81 U$69.2
K54: IC20.82 U$70.2
MIDI_RXD: IC7.93 R15.1 U$4.6
MIDI_RXD1: IC10.93 R53.1 U$51.6
MIDI_RXD2: IC20.93 R81.1 U$77.6
MIDI_TXD: IC6.2 IC7.92
MIDI_TXD1: IC10.92 IC18.2
MIDI_TXD2: IC20.92 IC27.2
MIDIIN_1: D4.2 U$50.1 U$51.3
MIDIIN_2: R52.1 U$50.2
MIDIIN_3: D6.2 U$76.1 U$77.3
MIDIIN_4: R10.1 U$3.2
MIDIIN_5: D2.2 U$3.1 U$4.3
MIDIIN_6: R80.1 U$76.2
MIDIOUT_1: R55.2 U$50.3
MIDIOUT_2: R54.2 U$50.4
MIDIOUT_3: R83.2 U$76.3
MIDIOUT_4: R22.2 U$3.4
MIDIOUT_5: R23.2 U$3.3
MIDIOUT_6: R82.2 U$76.4
MODE: IC7.83 MODE.2
MODE1: IC10.83 MODE1.2
MODE2: IC20.83 MODE2.2
MODE_LED_1: IC7.95 R19.2
MODE_LED_2: IC7.91 R20.2
MODE_LED_3: IC7.90 R21.2
MODE_LED_4: IC10.95 R32.2
MODE_LED_5: IC10.91 R33.2
MODE_LED_6: IC10.90 R34.2
MODE_LED_7: IC20.95 R60.2
MODE_LED_8: IC20.91 R61.2
MODE_LED_9: IC20.90 R62.2
MRST: IC9.1 SWD.2
MRST1: IC12.1 SWD1.2
MRST2: IC21.1 SWD2.2
N$1: MODE_LED.6 R19.1
N$2: MODE_LED.4 R20.1
N$3: C34.1 IC7.13 Y1.2
N$4: MODE_LED.2 R21.1
N$5: C24.A IC7.49
N$6: C33.1 IC7.12 Y1.1
N$7: IC3.2 R11.2 U$2.2
N$8: IC3.3 R14.1
N$9: C4.+ Q1.4 U$33.P$3 U$33.P$11
N$10: IC11.4 R3.1
N$11: CLK_LED.6 R6.1
N$12: IC5.4 R5.1
N$13: IC7.67 R24.2
N$14: CLK_LED.4 R7.1
N$15: CLK_LED.2 R8.1
N$16: R31.1 SEQ_LED1.2
N$17: C25.A IC7.73
N$18: IC4.6 R12.1
N$19: R18.1 SEQ_LED.2
N$20: R17.1 SEQ_LED.4
N$21: IC7.94 R9.1
N$22: R16.1 SEQ_LED.6
N$23: R26.1 SEQ_LED1.4
N$24: IC3.1 IC3.5 U$2.1
N$25: R25.1 SEQ_LED1.6
N$26: MODE_LED1.6 R32.1
N$27: IC1.3 IC4.2
N$28: C22.1 IC7.22 L1.2 R13.2
N$29: C23.1 IC7.21 R13.1
N$30: D2.1 R10.2 U$4.2
N$31: MODE_LED1.4 R33.1
N$32: MODE_LED1.2 R34.1
N$33: C38.1 IC10.13 Y2.2
N$34: IC6.4 R23.1
N$35: C39.1 IC10.12 Y2.1
N$36: IC1.6 IC4.3
N$37: IC1.8 IC4.4
N$38: D1.1 Q2.1 R1.2 R2.2
N$39: IC10.94 R35.1
N$40: C41.A IC10.73
N$41: C40.A IC10.49
N$42: C35.1 IC10.22 L2.2 R36.2
N$43: C44.1 IC10.21 R36.1
N$44: IC13.6 R48.1
N$45: IC14.2 R47.2 U$49.2
N$46: IC14.3 R49.1
N$47: C52.+ Q3.4 U$48.P$3 U$48.P$11
N$48: IC15.4 R50.1
N$49: IC16.4 R51.1
N$50: CLK_LED1.6 R41.1
N$51: CLK_LED1.4 R42.1
N$52: CLK_LED1.2 R43.1
N$53: IC14.1 IC14.5 U$49.1
N$54: IC13.2 IC17.3
N$55: IC13.3 IC17.6
N$56: IC13.4 IC17.8
N$57: D3.1 Q4.1 R44.2 R45.2
N$58: D4.1 R52.2 U$51.2
N$59: IC18.4 R55.1
N$60: IC10.67 R56.2
N$61: R59.1 SEQ_LED2.2
N$62: R58.1 SEQ_LED2.4
N$63: R57.1 SEQ_LED2.6
N$64: MODE_LED2.6 R60.1
N$65: MODE_LED2.4 R61.1
N$66: MODE_LED2.2 R62.1
N$67: C66.1 IC20.13 Y3.2
N$68: C67.1 IC20.12 Y3.1
N$69: IC20.94 R63.1
N$70: C69.A IC20.73
N$71: C68.A IC20.49
N$72: C64.1 IC20.22 L3.2 R64.2
N$73: C72.1 IC20.21 R64.1
N$74: IC22.6 R76.1
N$75: IC23.2 R75.2 U$75.2
N$76: IC23.3 R77.1
N$77: C80.+ Q5.4 U$74.P$3 U$74.P$11
N$78: IC24.4 R78.1
N$79: IC25.4 R79.1
N$80: CLK_LED2.6 R69.1
N$81: CLK_LED2.4 R70.1
N$82: CLK_LED2.2 R71.1
N$83: IC23.1 IC23.5 U$75.1
N$84: IC22.2 IC26.3
N$85: IC22.3 IC26.6
N$86: IC22.4 IC26.8
N$87: D5.1 Q6.1 R72.2 R73.2
N$88: D6.1 R80.2 U$77.2
N$89: IC27.4 R83.1
N$90: IC20.67 R84.2
NRST: IC7.14 IC9.7 R27.2
NRST1: IC10.14 IC12.7 R37.2
NRST2: IC20.14 IC21.7 R65.2
PWM_J: C13.1 R24.1 U$3.8
PWM_J1: C56.1 R56.1 U$50.8
PWM_J2: C84.1 R84.1 U$76.8
RANGE: IC7.36 RANGE.WIPER
RANGE1: IC10.36 RANGE1.WIPER
RANGE2: IC20.36 RANGE2.WIPER
RATE: IC7.35 RATE.WIPER
RATE1: IC10.35 RATE1.WIPER
RATE2: IC20.35 RATE2.WIPER
SEQ_LED_1: IC7.98 R16.2
SEQ_LED_2: IC7.97 R17.2
SEQ_LED_3: IC7.96 R18.2
SEQ_LED_4: IC10.98 R25.2
SEQ_LED_5: IC10.97 R26.2
SEQ_LED_6: IC10.96 R31.2
SEQ_LED_7: IC20.98 R57.2
SEQ_LED_8: IC20.97 R58.2
SEQ_LED_9: IC20.96 R59.2
SWDCLK: IC7.76 R29.1 SWD.3
SWDCLK1: IC10.76 R39.1 SWD1.3
SWDCLK2: IC20.76 R67.1 SWD2.3
SWDIO: IC7.72 R30.1 SWD.4
SWDIO1: IC10.72 R40.1 SWD1.4
SWDIO2: IC20.72 R68.1 SWD2.4
SWO: IC7.89 R28.1 SWD.5
SWO1: IC10.89 R38.1 SWD1.5
SWO2: IC20.89 R66.1 SWD2.5
TRIG: IC7.84 IC11.2
TRIG1: IC10.84 IC15.2
TRIG2: IC20.84 IC24.2
TRIG_J: R3.2 U$3.6
TRIG_J1: R50.2 U$50.6
TRIG_J2: R78.2 U$76.6
TUNE: IC7.17 TUNE.WIPER
TUNE1: IC10.17 TUNE1.WIPER
TUNE2: IC20.17 TUNE2.WIPER
UART2_RX: IC7.26
UART2_RX1: IC10.26
UART2_RX2: IC20.26
UART2_TX: IC7.25
UART2_TX1: IC10.25
UART2_TX2: IC20.25

## Tracks (layer width: path | path; a pad name or v marks a point on that pad's centre or on a via)
1V/OCT_J  (via drill 0.6)
  Top 0.254: IC3.7 IC3.6 100.13,53.3 v100.65,53.82 | v101.29,66.84 101.29,72.87 100.49,73.67 | 100.49,78.59 100.34,78.75 100.34,79.38 U$3.9
  Top 0.61: 100.49,73.67 100.49,78.59
  Bottom 0.254: v100.65,53.82 100.65,66.2 v101.29,66.84
1V/OCT_J1  (via drill 0.6)
  Top 0.254: IC14.7 IC14.6 100.13,135.34 v100.65,135.87 | v101.29,148.88 101.29,154.91 100.49,155.71 | 100.49,160.63 100.34,160.79 100.34,161.42 U$50.9
  Top 0.61: 100.49,155.71 100.49,160.63
  Bottom 0.254: v100.65,135.87 100.65,148.25 v101.29,148.88
1V/OCT_J2  (via drill 0.6)
  Top 0.254: IC23.7 IC23.6 100.13,217.38 v100.65,217.91 | v101.29,230.92 101.29,236.96 100.49,237.75 | 100.49,242.67 100.34,242.83 100.34,243.47 U$76.9
  Top 0.61: 100.49,237.75 100.49,242.67
  Bottom 0.254: v100.65,217.91 100.65,230.29 v101.29,230.92
+3.3V  (via drill 0.6)
  Top 0.254: C27.1 C32.1 36.84,18.58 37.48,19.22 IC7.6 40.5,19.22 41,19.72 IC7.100 41,24.42 40.49,24.93 36.99,24.93 | 42.08,12.71 42.06,12.72 IC7.19 36.38,12.72 35.41,11.75 34.51,11.75 C28.1 | 42.08,12.71 42,12.63 IC7.28 42,4.69 41.66,4.35 | 47.95,12.71 51.6,12.71 53,11.31 IC7.50 54.65,7.97 55.25,8.58 | 47.95,12.71 42.08,12.71 | IC7.11 41.33,16.72 41.6,16.99 47.16,16.99 47.95,16.2 47.95,12.71 | v49.85,19.69 51.12,19.69 53.16,21.72 IC7.75 56.01,21.72 57.16,22.87 57.16,23.72 C31.1 | IC9.2 13.66,19.69 15.09,21.12 15.09,23.5 | 15.09,23.5 v15.09,24.77 | 15.03,23.56 15.09,23.5 | C36.1 15.03,9.47 v15.56,10.01 | 36.99,24.93 36.04,24.93 35.73,25.25 35.73,26.2 C26.1 | 35.88,26.2 C26.1 | C26.1 34.45,26.2 | R28.2 36.89,24.83 36.99,24.93 | R29.2 R30.2 27.1,29.59 27.89,28.8 31.7,28.8 32.71,27.79 | R4.2 117.96,42.71 120.02,40.65 127.8,40.65 135.74,48.58 135.74,51.44 134.78,52.39 133.41,52.39 C12.1
  Top 0.305: v41.76,1.91 41.76,3.24 arc90 C29.1 41.66,4.35 | L1.1 arc-90 29.69,5.35 29.69,3.5 v28.42,1.91 | 34.45,26.2 SWD.6 | C30.1 55.25,8.58 | 69,52.61 v69.54,52.08 | 138.93,57.01 135.55,60.39 133.36,60.39 | 133.36,60.39 R15.2 123.25,60.39 122.24,59.38 122.24,56.12 U$4.8 | C12.1 133.36,60.39
  Top 0.406: 16.67,37.37 C7.1 | 32.71,27.79 SWD.6
  Top 0.61: IC2.2 13.98,40.33 15.09,39.22 15.88,39.22 16.67,38.42 16.67,37.37 | C7.1 v18.42,37.31 C6.A | TUNE.3 69,52.61 | 138.93,57.01 RANGE.3
  Bottom 0.254: v49.85,19.69 49.85,21.28 48.9,22.23 41.28,22.23 37.31,26.2 32.87,26.2 32.23,26.84 | v15.56,10.01 13.82,10.01 13.66,10.17 | v15.09,24.77 13.98,24.77
  Bottom 0.305: 13.34,29.14 SEQ_LED.5 | 13.34,32.78 SEQ_LED.1 | v28.42,1.91 28.42,0.64 | SWD.6 32.71,26.36 32.23,26.84 31.28,27.79 29.06,27.79 28.58,28.26 | 18.2,54.52 18.9,53.82 20.64,53.82 25.25,49.22 25.25,40.49 | 42.38,56.85 41.6,57.63 41.6,61.28 | 67.47,58.54 67.47,60.17 66.36,61.28 49.54,61.28 48.74,62.08 42.39,62.08 41.6,61.28 | 41.6,61.28 24.93,61.28 23.66,62.55 17.79,62.55 16.2,60.97 16.2,57.79 16.99,57 17.01,57.01 | v69.54,52.08 69.7,51.92 114.62,51.92 120.97,58.27 120.97,62.2 MODE_LED.5 MODE_LED.3 MODE_LED.1 120.97,65.91 120.97,67 122.4,68.43 127.48,68.43 130.02,65.89 130.02,58.74 131.75,57.01 | RANGE.3 140.18,56.95 | 140.18,54.62 140.98,53.82 150.03,53.82 153.36,57.16 | 165.38,57.16 RATE.3 | 165.52,54.36 166.38,53.51 176.38,53.51 183.68,60.81 183.68,62.36 CLK_LED.5 CLK_LED.3 CLK_LED.1
  Bottom 0.406: 13.34,29.14 13.34,28.11 13.98,27.47 13.98,24.77 13.98,21.6 10.8,18.42 10.8,13.02 13.66,10.17 13.66,7.47 11.12,4.93 10.96,4.93 10.96,1.91 12.23,0.64 28.42,0.64 41.76,0.64 v41.76,1.91 | SEQ_LED.5 SEQ_LED.3 SEQ_LED.1 | 13.34,32.78 13.34,33.82 13.98,34.45 18.26,34.45 27.91,34.45 28.6,33.96 28.6,28.26 28.58,28.26 | v18.42,37.31 18.26,37.15
  Bottom 0.61: 18.26,34.45 18.26,37.15 21.91,37.15 25.25,40.49 | 18.2,54.52 DUR.3 17.01,57.01 | GLIDE.3 42.38,56.85 | 67.47,58.54 TUNE.3 | RANGE.3 131.75,57.01 | 140.18,56.95 140.18,54.62 | 153.36,57.16 165.38,57.16 | RATE.3 165.52,54.36
+3.3V1  (via drill 0.6)
  Top 0.254: C17.1 C43.1 36.84,100.62 37.48,101.27 IC10.6 40.5,101.27 41,101.77 IC10.100 41,106.46 40.49,106.97 36.99,106.97 | 42.08,94.75 42.06,94.77 IC10.19 36.38,94.77 35.41,93.8 34.51,93.8 C19.1 | 42.08,94.75 42,94.67 IC10.28 42,86.73 41.66,86.39 | 47.95,94.75 51.6,94.75 53,93.35 IC10.50 54.65,90.02 55.25,90.62 | 47.95,94.75 42.08,94.75 | IC10.11 41.33,98.77 41.6,99.03 47.16,99.03 47.95,98.24 47.95,94.75 | v49.85,101.73 51.12,101.73 53.16,103.77 IC10.75 56.01,103.77 57.16,104.91 57.16,105.76 C42.1 | IC12.2 13.66,101.73 15.09,103.16 15.09,105.54 | 15.09,105.54 v15.09,106.81 | 15.03,105.6 15.09,105.54 | C45.1 15.03,91.52 v15.56,92.05 | 36.99,106.97 36.04,106.97 35.73,107.29 35.73,108.24 C37.1 | 35.88,108.24 C37.1 | C37.1 34.45,108.24 | R38.2 36.89,106.87 36.99,106.97 | R39.2 R40.2 27.1,111.63 27.89,110.84 31.7,110.84 32.71,109.83 | R46.2 117.96,124.75 120.02,122.69 127.8,122.69 135.74,130.63 135.74,133.48 134.78,134.44 133.41,134.44 C54.1
  Top 0.305: v41.76,83.95 41.76,85.28 arc90 C20.1 41.66,86.39 | L2.1 arc-90 29.69,87.39 29.69,85.54 v28.42,83.95 | 34.45,108.24 SWD1.6 | C21.1 55.25,90.62 | 69,134.65 v69.54,134.12 | 138.93,139.05 135.55,142.43 133.36,142.43 | 133.36,142.43 R53.2 123.25,142.43 122.24,141.42 122.24,138.16 U$51.8 | C54.1 133.36,142.43
  Top 0.406: 16.67,119.41 C14.1 | 32.71,109.83 SWD1.6
  Top 0.61: IC8.2 13.98,122.37 15.09,121.26 15.88,121.26 16.67,120.47 16.67,119.41 | C14.1 v18.42,119.36 C16.A | TUNE1.3 69,134.65 | 138.93,139.05 RANGE1.3
  Bottom 0.254: v49.85,101.73 49.85,103.32 48.9,104.27 41.28,104.27 37.31,108.24 32.87,108.24 32.23,108.88 | v15.56,92.05 13.82,92.05 13.66,92.21 | v15.09,106.81 13.98,106.81
  Bottom 0.305: 13.34,111.18 SEQ_LED1.5 | 13.34,114.83 SEQ_LED1.1 | v28.42,83.95 28.42,82.68 | SWD1.6 32.71,108.4 32.23,108.88 31.28,109.83 29.06,109.83 28.58,110.31 | 18.2,136.56 18.9,135.87 20.64,135.87 25.25,131.26 25.25,122.53 | 42.38,138.9 41.6,139.68 41.6,143.33 | 67.47,140.58 67.47,142.22 66.36,143.33 49.54,143.33 48.74,144.12 42.39,144.12 41.6,143.33 | 41.6,143.33 24.93,143.33 23.66,144.6 17.79,144.6 16.2,143.01 16.2,139.83 16.99,139.04 17.01,139.05 | v69.54,134.12 69.7,133.96 114.62,133.96 120.97,140.31 120.97,144.25 MODE_LED1.5 MODE_LED1.3 MODE_LED1.1 120.97,147.96 120.97,149.04 122.4,150.47 127.48,150.47 130.02,147.93 130.02,140.79 131.75,139.05 | RANGE1.3 140.18,139 | 140.18,136.66 140.98,135.87 150.03,135.87 153.36,139.2 | 165.38,139.2 RATE1.3 | 165.52,136.4 166.38,135.55 176.38,135.55 183.68,142.85 183.68,144.41 CLK_LED1.5 CLK_LED1.3 CLK_LED1.1
  Bottom 0.406: 13.34,111.18 13.34,110.15 13.98,109.51 13.98,106.81 13.98,103.64 10.8,100.46 10.8,95.07 13.66,92.21 13.66,89.51 11.12,86.97 10.96,86.97 10.96,83.95 12.23,82.68 28.42,82.68 41.76,82.68 v41.76,83.95 | SEQ_LED1.5 SEQ_LED1.3 SEQ_LED1.1 | 13.34,114.83 13.34,115.86 13.98,116.5 18.26,116.5 27.91,116.5 28.6,116 28.6,110.31 28.58,110.31 | v18.42,119.36 18.26,119.2
  Bottom 0.61: 18.26,116.5 18.26,119.2 21.91,119.2 25.25,122.53 | 18.2,136.56 DUR1.3 17.01,139.05 | GLIDE1.3 42.38,138.9 | 67.47,140.58 TUNE1.3 | RANGE1.3 131.75,139.05 | 140.18,139 140.18,136.66 | 153.36,139.2 165.38,139.2 | RATE1.3 165.52,136.4
+3.3V2  (via drill 0.6)
  Top 0.254: C60.1 C71.1 36.84,182.66 37.48,183.31 IC20.6 40.5,183.31 41,183.81 IC20.100 41,188.5 40.49,189.01 36.99,189.01 | 42.08,176.79 42.06,176.81 IC20.19 36.38,176.81 35.41,175.84 34.51,175.84 C61.1 | 42.08,176.79 42,176.71 IC20.28 42,168.77 41.66,168.43 | 47.95,176.79 51.6,176.79 53,175.39 IC20.50 54.65,172.06 55.25,172.66 | 47.95,176.79 42.08,176.79 | IC20.11 41.33,180.81 41.6,181.08 47.16,181.08 47.95,180.28 47.95,176.79 | v49.85,183.78 51.12,183.78 53.16,185.81 IC20.75 56.01,185.81 57.16,186.95 57.16,187.8 C70.1 | IC21.2 13.66,183.78 15.09,185.2 15.09,187.59 | 15.09,187.59 v15.09,188.85 | 15.03,187.64 15.09,187.59 | C73.1 15.03,173.56 v15.56,174.09 | 36.99,189.01 36.04,189.01 35.73,189.33 35.73,190.28 C65.1 | 35.88,190.28 C65.1 | C65.1 34.45,190.28 | R66.2 36.89,188.91 36.99,189.01 | R67.2 R68.2 27.1,193.67 27.89,192.88 31.7,192.88 32.71,191.87 | R74.2 117.96,206.79 120.02,204.73 127.8,204.73 135.74,212.67 135.74,215.53 134.78,216.48 133.41,216.48 C82.1
  Top 0.305: v41.76,166 41.76,167.32 arc90 C62.1 41.66,168.43 | L3.1 arc-90 29.69,169.43 29.69,167.58 v28.42,166 | 34.45,190.28 SWD2.6 | C63.1 55.25,172.66 | 69,216.7 v69.54,216.16 | 138.93,221.1 135.55,224.47 133.36,224.47 | 133.36,224.47 R81.2 123.25,224.47 122.24,223.46 122.24,220.2 U$77.8 | C82.1 133.36,224.47
  Top 0.406: 16.67,201.45 C57.1 | 32.71,191.87 SWD2.6
  Top 0.61: IC19.2 13.98,204.41 15.09,203.3 15.88,203.3 16.67,202.51 16.67,201.45 | C57.1 v18.42,201.4 C59.A | TUNE2.3 69,216.7 | 138.93,221.1 RANGE2.3
  Bottom 0.254: v49.85,183.78 49.85,185.36 48.9,186.31 41.28,186.31 37.31,190.28 32.87,190.28 32.23,190.92 | v15.56,174.09 13.82,174.09 13.66,174.25 | v15.09,188.85 13.98,188.85
  Bottom 0.305: 13.34,193.22 SEQ_LED2.5 | 13.34,196.87 SEQ_LED2.1 | v28.42,166 28.42,164.72 | SWD2.6 32.71,190.44 32.23,190.92 31.28,191.87 29.06,191.87 28.58,192.35 | 18.2,218.6 18.9,217.91 20.64,217.91 25.25,213.3 25.25,204.57 | 42.38,220.94 41.6,221.72 41.6,225.37 | 67.47,222.62 67.47,224.26 66.36,225.37 49.54,225.37 48.74,226.16 42.39,226.16 41.6,225.37 | 41.6,225.37 24.93,225.37 23.66,226.64 17.79,226.64 16.2,225.05 16.2,221.88 16.99,221.08 17.01,221.1 | v69.54,216.16 69.7,216 114.62,216 120.97,222.35 120.97,226.29 MODE_LED2.5 MODE_LED2.3 MODE_LED2.1 120.97,230 120.97,231.08 122.4,232.51 127.48,232.51 130.02,229.97 130.02,222.83 131.75,221.1 | RANGE2.3 140.18,221.04 | 140.18,218.7 140.98,217.91 150.03,217.91 153.36,221.24 | 165.38,221.24 RATE2.3 | 165.52,218.44 166.38,217.59 176.38,217.59 183.68,224.89 183.68,226.45 CLK_LED2.5 CLK_LED2.3 CLK_LED2.1
  Bottom 0.406: 13.34,193.22 13.34,192.19 13.98,191.55 13.98,188.85 13.98,185.68 10.8,182.5 10.8,177.11 13.66,174.25 13.66,171.55 11.12,169.01 10.96,169.01 10.96,166 12.23,164.72 28.42,164.72 41.76,164.72 v41.76,166 | SEQ_LED2.5 SEQ_LED2.3 SEQ_LED2.1 | 13.34,196.87 13.34,197.9 13.98,198.54 18.26,198.54 27.91,198.54 28.6,198.04 28.6,192.35 28.58,192.35 | v18.42,201.4 18.26,201.24
  Bottom 0.61: 18.26,198.54 18.26,201.24 21.91,201.24 25.25,204.57 | 18.2,218.6 DUR2.3 17.01,221.1 | GLIDE2.3 42.38,220.94 | 67.47,222.62 TUNE2.3 | RANGE2.3 131.75,221.1 | 140.18,221.04 140.18,218.7 | 153.36,221.24 165.38,221.24 | RATE2.3 165.52,218.44
+5V  (via drill 0.6)
  Top 0.254: IC4.1 89.51,50.2 87.48,52.23 82.56,52.23 78.35,56.44 | IC6.5 111.45,58.27 111.13,57.95 110.39,57.95 | 110.39,57.95 C18.1 110.34,59.7 108.11,61.92 R22.1 | R12.2 v90.33,38.42 | 110.39,57.95 108.27,57.95 106.69,59.54 97.8,59.54 97,60.33 97,64.3 97.48,64.78 99.07,64.78 100.18,65.89 100.18,67.32 100.49,67.63 100.49,68.59 97.95,71.13 97.95,72.56 | C9.1 74.24,52.08 75.25,52.08
  Top 0.305: IC1.14 75.25,52.08 75.25,53.35 78.35,56.44 80.17,58.27 80.17,66.2 | 80.17,66.2 80.17,72.56 | C2.1 v91.45,47 | v91.45,47 89.7,47 IC4.1 | C3.A 93.02,46.37 92.4,47 v91.45,47 | IC5.5 81.6,67.88 81.6,66.2 | 81.6,66.2 80.17,66.2 | C8.1 86.84,68.21 86.84,65.97 | 81.6,66.2 82.71,66.2 82.87,66.05 83.03,65.97 86.84,65.97 | C5.1 93.99,68.09 93.99,66.52 93.43,65.97 89.42,65.97 | IC11.5 89.42,65.97 | 89.42,65.97 86.84,65.97
  Top 0.61: IC2.3 v20.09,42.15 | v15.25,52.87 12.07,56.05 12.07,69.7 14.09,71.72 Q1.3 30.78,70.94 C1.+ 30.78,79.52 31.6,80.33 72.4,80.33 80.17,72.56 97.95,72.56 U$3.11
  Bottom 0.254: v90.33,38.42 91.45,39.53 v91.45,47
  Bottom 0.61: v15.25,52.87 19.53,52.87 20.48,51.92 20.48,42.55 v20.09,42.15
+5V1  (via drill 0.6)
  Top 0.254: IC13.1 89.51,132.25 87.48,134.28 82.56,134.28 78.35,138.48 | IC18.5 111.45,140.31 111.13,139.99 110.39,139.99 | 110.39,139.99 C55.1 110.34,141.74 108.11,143.96 R54.1 | R48.2 v90.33,120.47 | 110.39,139.99 108.27,139.99 106.69,141.58 97.8,141.58 97,142.37 97,146.34 97.48,146.82 99.07,146.82 100.18,147.93 100.18,149.36 100.49,149.68 100.49,150.63 97.95,153.17 97.95,154.6 | C49.1 74.24,134.12 75.25,134.12
  Top 0.305: IC17.14 75.25,134.12 75.25,135.39 78.35,138.48 80.17,140.31 80.17,148.25 | 80.17,148.25 80.17,154.6 | C50.1 v91.45,129.04 | v91.45,129.04 89.7,129.04 IC13.1 | C46.A 93.02,128.41 92.4,129.04 v91.45,129.04 | IC16.5 81.6,149.92 81.6,148.25 | 81.6,148.25 80.17,148.25 | C48.1 86.84,150.25 86.84,148.01 | 81.6,148.25 82.71,148.25 82.87,148.09 83.03,148.01 86.84,148.01 | C47.1 93.99,150.13 93.99,148.56 93.43,148.01 89.42,148.01 | IC15.5 89.42,148.01 | 89.42,148.01 86.84,148.01
  Top 0.61: IC8.3 v20.09,124.19 | v15.25,134.91 12.07,138.09 12.07,151.74 14.09,153.76 Q3.3 30.78,152.98 C15.+ 30.78,161.56 31.6,162.38 72.4,162.38 80.17,154.6 97.95,154.6 U$50.11
  Bottom 0.254: v90.33,120.47 91.45,121.58 v91.45,129.04
  Bottom 0.61: v15.25,134.91 19.53,134.91 20.48,133.96 20.48,124.59 v20.09,124.19
+5V2  (via drill 0.6)
  Top 0.254: IC22.1 89.51,214.29 87.48,216.32 82.56,216.32 78.35,220.53 | IC27.5 111.45,222.35 111.13,222.03 110.39,222.03 | 110.39,222.03 C83.1 110.34,223.78 108.11,226 R82.1 | R76.2 v90.33,202.51 | 110.39,222.03 108.27,222.03 106.69,223.62 97.8,223.62 97,224.41 97,228.38 97.48,228.86 99.07,228.86 100.18,229.97 100.18,231.4 100.49,231.72 100.49,232.67 97.95,235.21 97.95,236.64 | C77.1 74.24,216.16 75.25,216.16
  Top 0.305: IC26.14 75.25,216.16 75.25,217.43 78.35,220.53 80.17,222.35 80.17,230.29 | 80.17,230.29 80.17,236.64 | C78.1 v91.45,211.08 | v91.45,211.08 89.7,211.08 IC22.1 | C74.A 93.02,210.46 92.4,211.08 v91.45,211.08 | IC25.5 81.6,231.96 81.6,230.29 | 81.6,230.29 80.17,230.29 | C76.1 86.84,232.29 86.84,230.05 | 81.6,230.29 82.71,230.29 82.87,230.13 83.03,230.05 86.84,230.05 | C75.1 93.99,232.18 93.99,230.61 93.43,230.05 89.42,230.05 | IC24.5 89.42,230.05 | 89.42,230.05 86.84,230.05
  Top 0.61: IC19.3 v20.09,206.24 | v15.25,216.95 12.07,220.13 12.07,233.78 14.09,235.8 Q5.3 30.78,235.02 C58.+ 30.78,243.6 31.6,244.42 72.4,244.42 80.17,236.64 97.95,236.64 U$76.11
  Bottom 0.254: v90.33,202.51 91.45,203.62 v91.45,211.08
  Bottom 0.61: v15.25,216.95 19.53,216.95 20.48,216 20.48,206.63 v20.09,206.24
+12V  (via drill 0.6)
  Top 0.254: C11.1 97.9,45.47 97.64,45.73 97.64,47.14 IC3.8 97.59,53.35
  Top 0.406: 99.38,66.68 98.27,65.57 97.16,65.57 96.21,64.62 96.21,58.11 97.59,56.73 97.59,53.35 97.43,53.19 v96.21,53.19 | v38.9,54.46 38.9,50.48 U$33.P$12
  Top 0.61: 99.38,66.68 v99.38,67.95 | U$33.P$12 U$33.P$4 38.81,40.56 38.42,40.17 38.42,35.43 C10.+
  Bottom 0.406: v96.21,53.19 42.23,53.19 40.72,54.69 39.13,54.69 v38.9,54.46
  Bottom 0.61: v99.38,67.95 99.38,72.4 100.49,73.51 U$3.10
+12V1  (via drill 0.6)
  Top 0.254: C51.1 97.9,127.51 97.64,127.77 97.64,129.18 IC14.8 97.59,135.39
  Top 0.406: 99.38,148.72 98.27,147.61 97.16,147.61 96.21,146.66 96.21,140.15 97.59,138.77 97.59,135.39 97.43,135.23 v96.21,135.23 | v38.9,136.5 38.9,132.52 U$48.P$12
  Top 0.61: 99.38,148.72 v99.38,149.99 | U$48.P$12 U$48.P$4 38.81,122.6 38.42,122.21 38.42,117.47 C53.+
  Bottom 0.406: v96.21,135.23 42.23,135.23 40.72,136.73 39.13,136.73 v38.9,136.5
  Bottom 0.61: v99.38,149.99 99.38,154.44 100.49,155.55 U$50.10
+12V2  (via drill 0.6)
  Top 0.254: C79.1 97.9,209.55 97.64,209.81 97.64,211.22 IC23.8 97.59,217.43
  Top 0.406: 99.38,230.76 98.27,229.65 97.16,229.65 96.21,228.7 96.21,222.19 97.59,220.81 97.59,217.43 97.43,217.27 v96.21,217.27 | v38.9,218.54 38.9,214.57 U$74.P$12
  Top 0.61: 99.38,230.76 v99.38,232.03 | U$74.P$12 U$74.P$4 38.81,204.64 38.42,204.25 38.42,199.51 C81.+
  Bottom 0.406: v96.21,217.27 42.23,217.27 40.72,218.77 39.13,218.77 v38.9,218.54
  Bottom 0.61: v99.38,232.03 99.38,236.48 100.49,237.59 U$76.10
-12V
  Top 0.61: U$33.P$16 U$33.P$8
-12V1
  Top 0.61: U$48.P$16 U$48.P$8
-12V2
  Top 0.61: U$74.P$16 U$74.P$8
CLK_LED_1
  Top 0.254: IC7.34 45,4.86 46.52,3.34 88.75,3.34 93.51,8.1 93.51,9.69 101.04,17.22 R6.2
CLK_LED_2
  Top 0.254: IC7.33 44.5,4.09 45.88,2.71 89.06,2.71 94.14,7.79 94.14,9.37 100.18,15.4 108.11,15.4 108.85,16.14 R7.2
CLK_LED_3
  Top 0.254: IC7.32 44,3.32 45.25,2.07 89.38,2.07 94.78,7.47 94.78,9.05 100.49,14.77 111.29,14.77 112,15.48 R8.2
CLK_LED_4
  Top 0.254: IC10.34 45,86.91 46.52,85.38 88.75,85.38 93.51,90.14 93.51,91.73 101.04,99.26 R41.2
CLK_LED_5
  Top 0.254: IC10.33 44.5,86.14 45.88,84.75 89.06,84.75 94.14,89.83 94.14,91.42 100.18,97.45 108.11,97.45 108.85,98.18 R42.2
CLK_LED_6
  Top 0.254: IC10.32 44,85.37 45.25,84.11 89.38,84.11 94.78,89.51 94.78,91.1 100.49,96.81 111.29,96.81 112,97.52 R43.2
CLK_LED_7
  Top 0.254: IC20.34 45,168.95 46.52,167.42 88.75,167.42 93.51,172.19 93.51,173.77 101.04,181.31 R69.2
CLK_LED_8
  Top 0.254: IC20.33 44.5,168.18 45.88,166.79 89.06,166.79 94.14,171.87 94.14,173.46 100.18,179.49 108.11,179.49 108.85,180.23 R70.2
CLK_LED_9
  Top 0.254: IC20.32 44,167.41 45.25,166.15 89.38,166.15 94.78,171.55 94.78,173.14 100.49,178.85 111.29,178.85 112,179.56 R71.2
CLKIN  (via drill 0.6)
  Top 0.254: IC7.31 43.5,2.87 44.93,1.44 93.19,1.44 96.05,4.29 96.05,7.47 100.97,12.39 v100.97,13.02 | v92.4,23.02 92.4,33.5 95.26,36.36 101.92,36.36 108.27,42.71 Q2.3 110.98,42.55 113.04,42.55 113.19,42.71 R4.1
  Bottom 0.254: v100.97,13.02 100.97,20.48 98.43,23.02 v92.4,23.02
CLKIN1  (via drill 0.6)
  Top 0.254: IC10.31 43.5,84.91 44.93,83.48 93.19,83.48 96.05,86.33 96.05,89.51 100.97,94.43 v100.97,95.07 | v92.4,105.07 92.4,115.55 95.26,118.4 101.92,118.4 108.27,124.75 Q4.3 110.98,124.59 113.04,124.59 113.19,124.75 R46.1
  Bottom 0.254: v100.97,95.07 100.97,102.53 98.43,105.07 v92.4,105.07
CLKIN2  (via drill 0.6)
  Top 0.254: IC20.31 43.5,166.96 44.93,165.52 93.19,165.52 96.05,168.38 96.05,171.55 100.97,176.47 v100.97,177.11 | v92.4,187.11 92.4,197.59 95.26,200.44 101.92,200.44 108.27,206.79 110.8,206.79 Q6.3 110.98,206.63 113.04,206.63 113.19,206.79 R74.1
  Bottom 0.254: v100.97,177.11 100.97,184.57 98.43,187.11 v92.4,187.11
CLKIN_J  (via drill 0.6)
  Top 0.254: R1.1 116.21,56.36 v115.26,57.31 | v104.46,69.22 104.46,73.03 105.57,74.14
  Top 0.61: 105.57,74.14 U$3.5